# Altium PCB MCU099_MSPM0L1306_PCB.PcbDoc (part 1 of 5)
Units mil, origin at the board's own origin, x right, y up, seen from the top; angles counter-clockwise.
Board outline 2310.03 x 3906.03 mil, 4 copper layers (Top Layer, VCC Layer, GND Layer, Bottom Layer), stack 62.4 mil thick; 211 components, 124 nets, 674 pads, 192 vias.
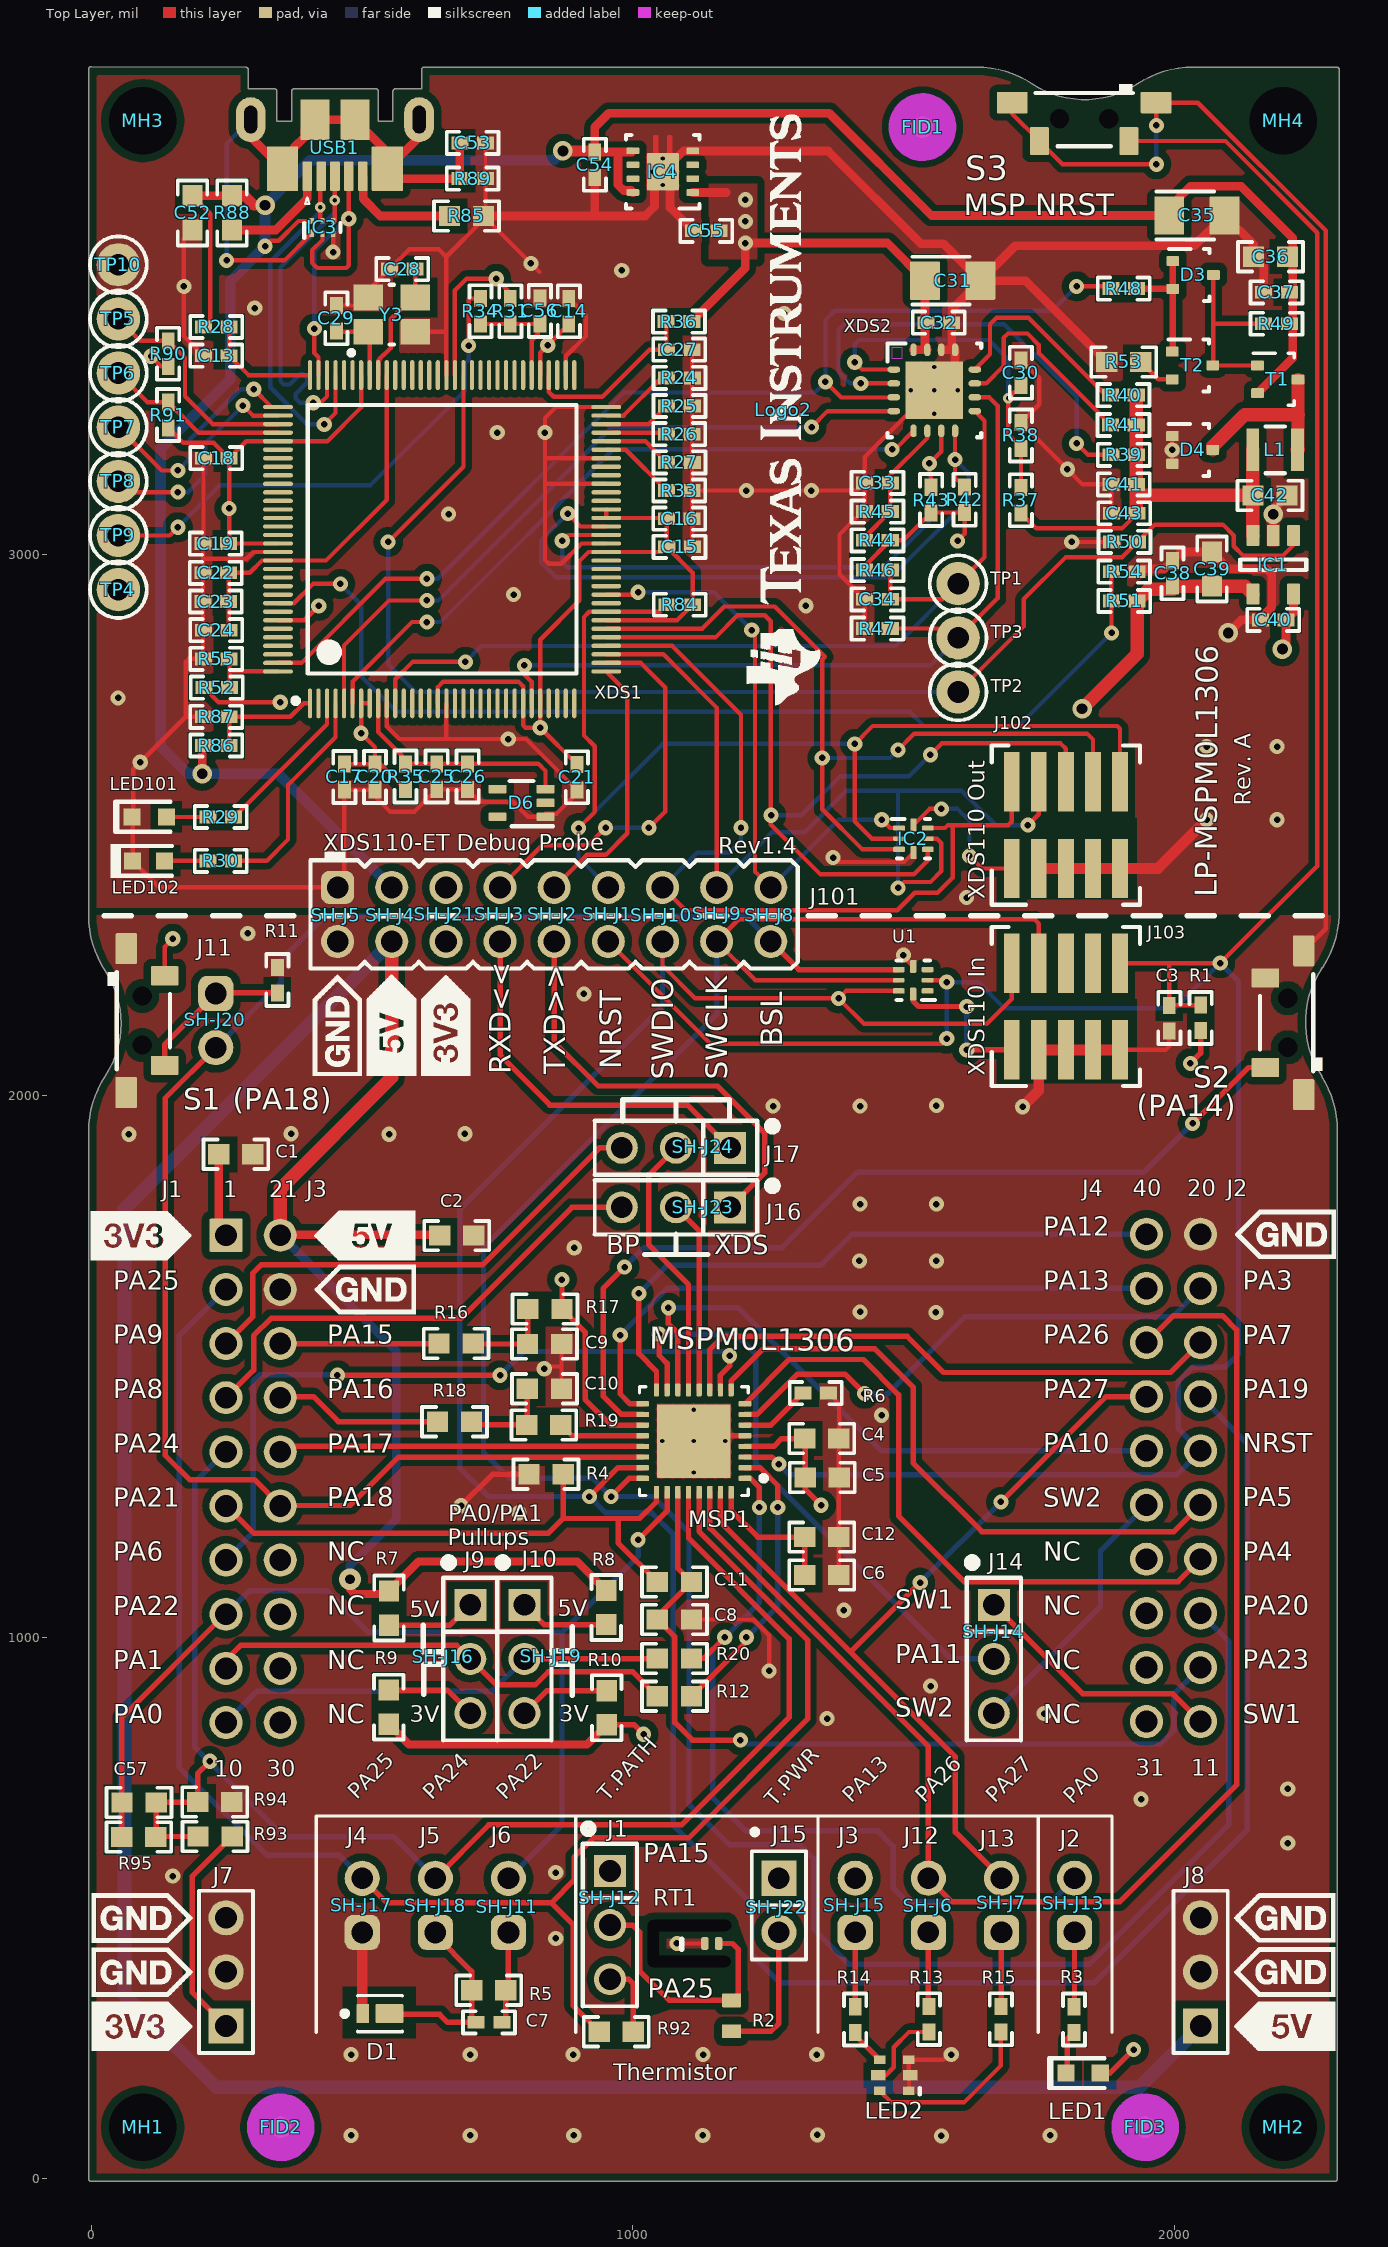
[diagram p0: Top Layer view]
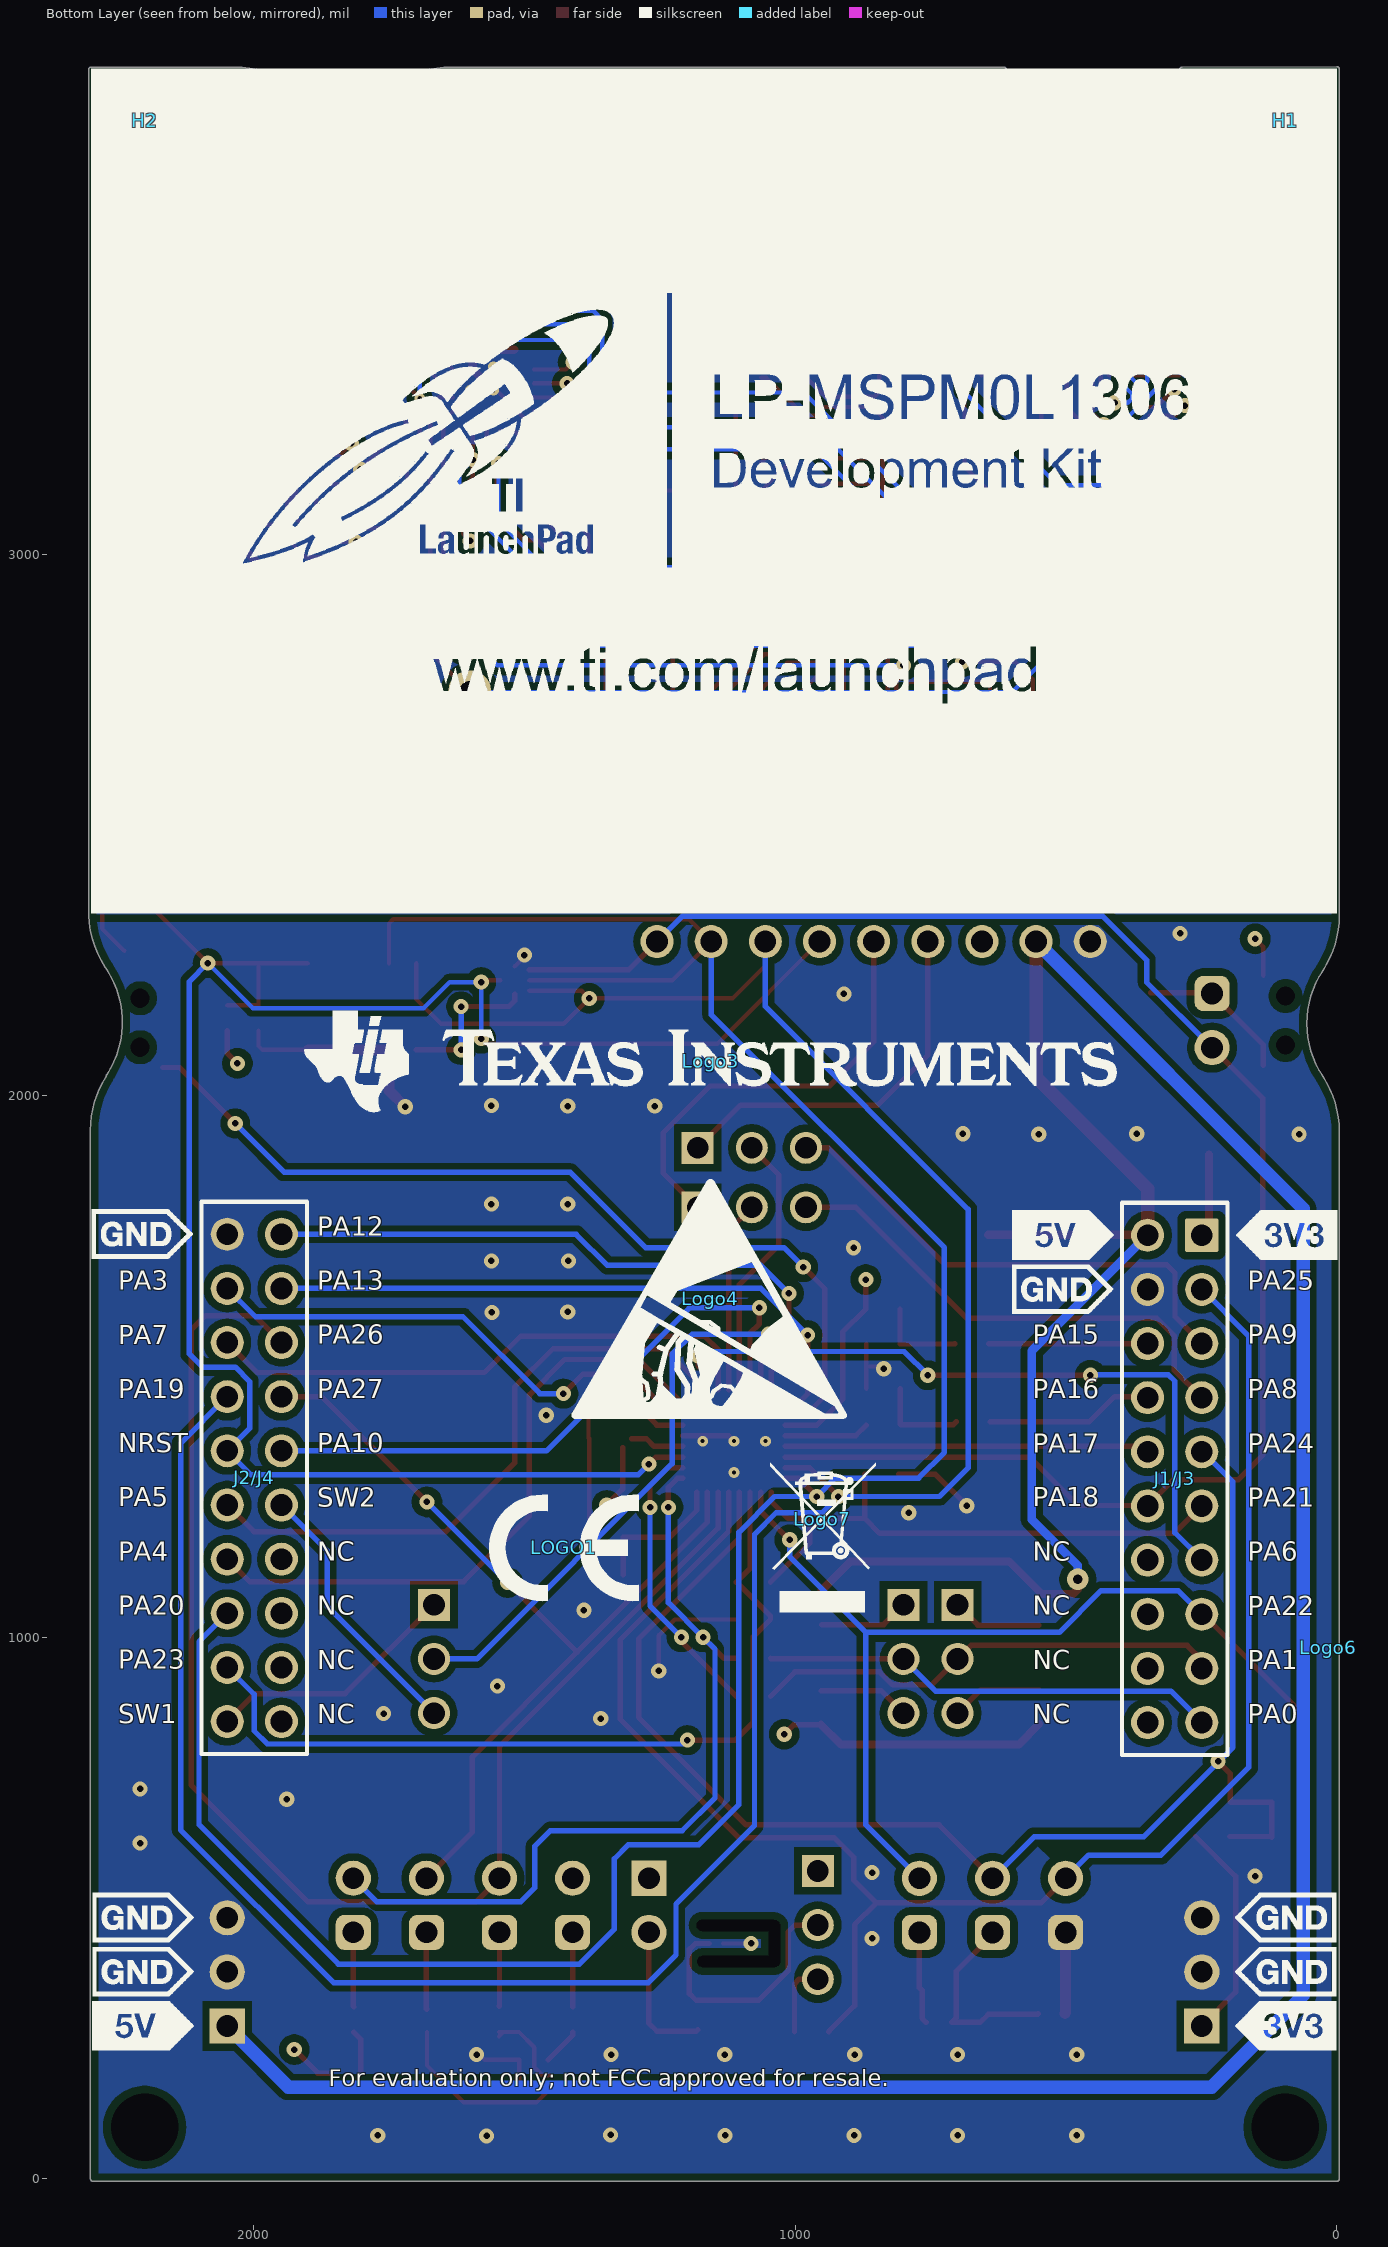
[diagram p1: Bottom Layer view, seen from below]
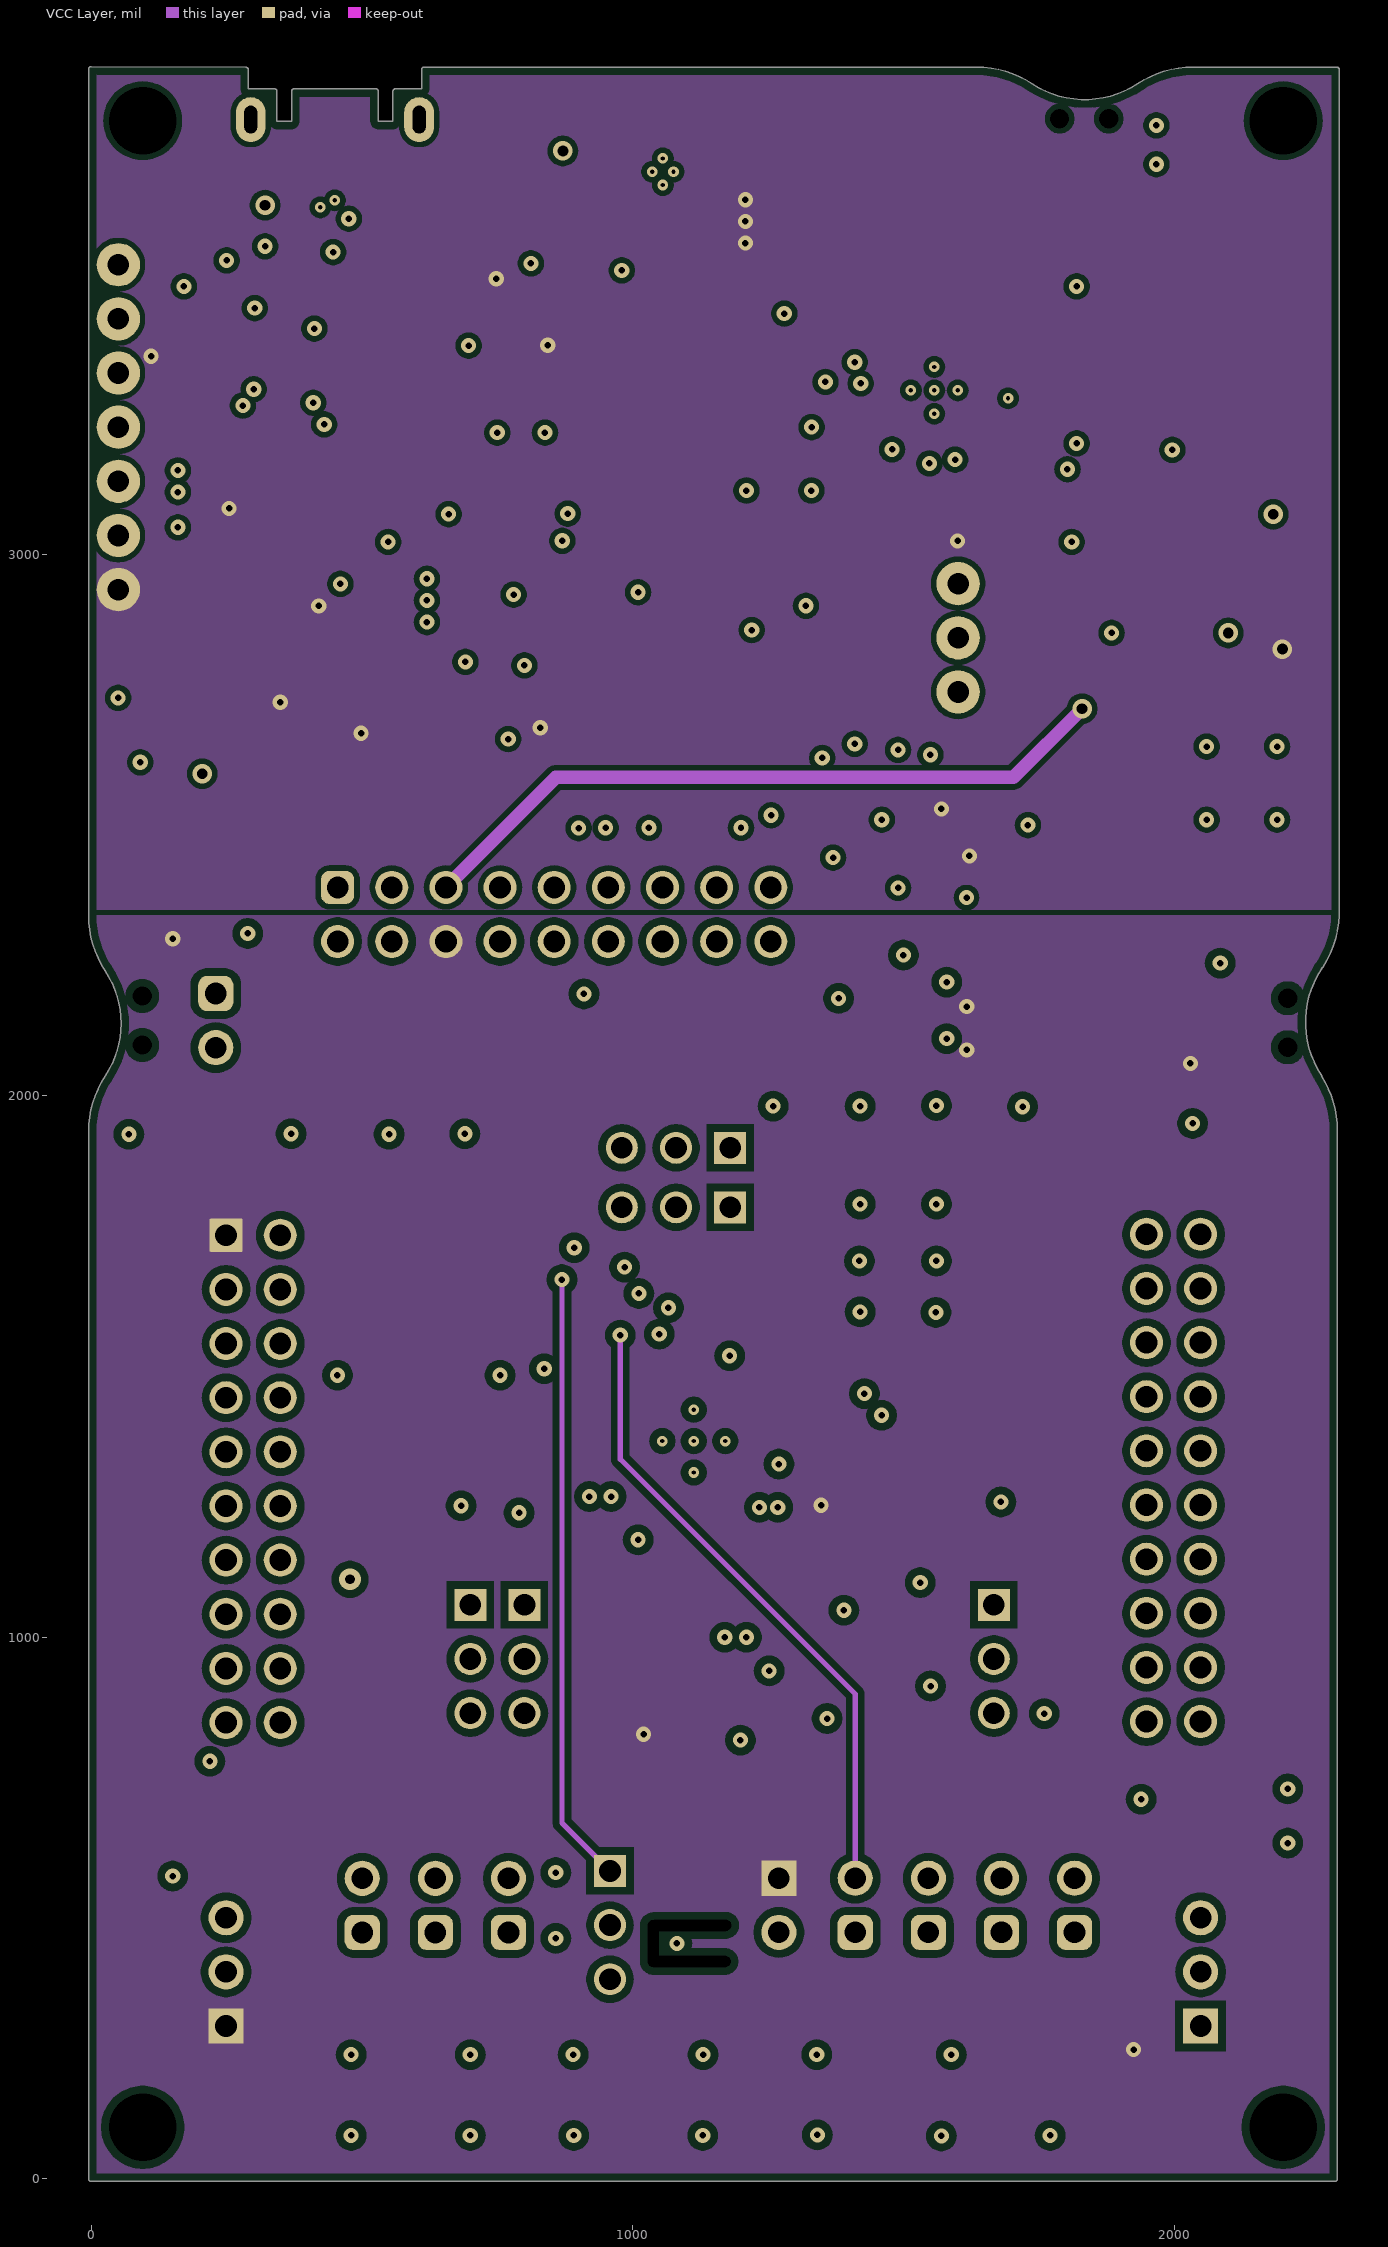
[diagram p2: VCC Layer]
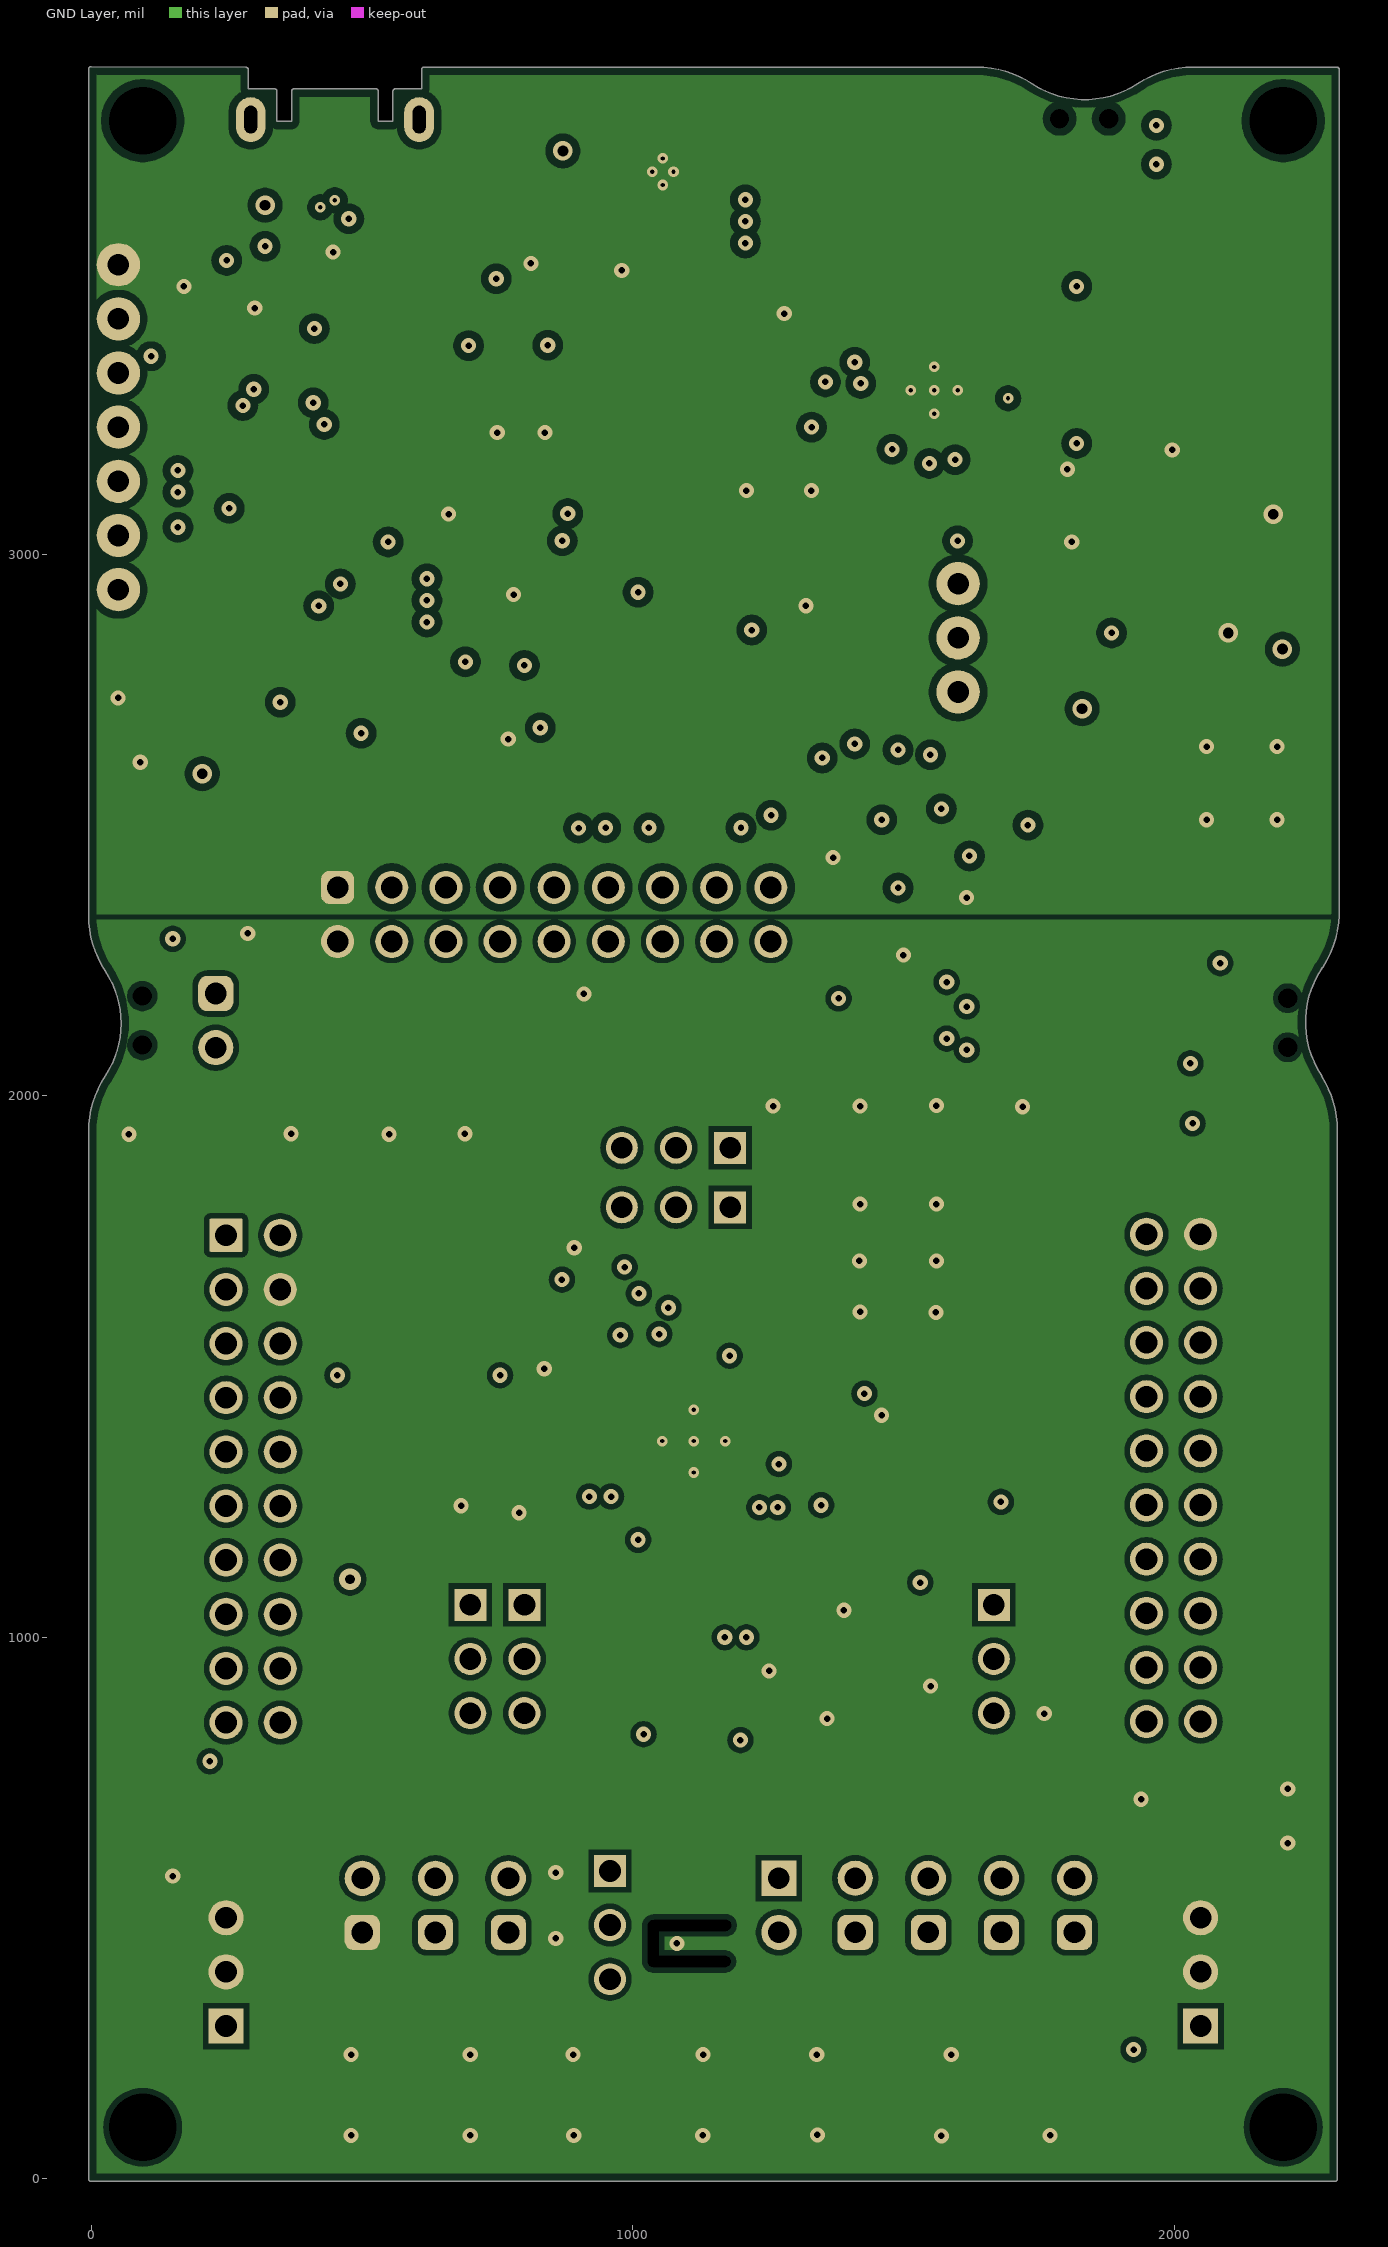
[diagram p3: GND Layer]

## Layer stack, top to bottom
Top Solder: solder mask 0.4, Solder Resist, Dk 3.5
Top Layer: signal copper 1.4
Dielectric 2: core 8.4, FR-4, Dk 4.2
VCC Layer: signal copper 1.4
Dielectric1: prepreg 40, FR-4, Dk 4.2
GND Layer: signal copper 1.4
Dielectric 3: core 8.4, FR-4, Dk 4.2
Bottom Layer: signal copper 1.4
Bottom Solder: solder mask 0.4, Solder Resist, Dk 3.5

## Board outline
-5.01,0 -5.01,1933.62 cw(c181.67,1933.62) 25.77,2036.32 cw(c181.67,1933.62) 25.81,2036.38 ccw(c-121.67,2133.62) 54.99,2133.62 ccw(c-121.67,2133.62) 25.81,2230.86 cw(c181.67,2333.62) -5.01,2333.62 cw(c0,2333.62) -4.97,2334.31 cw(c0,2335) -4.99,2335.51 ccw(c0,2336) -4.87,2334.81 ccw(c0,2333.62) -4.97,2334.31 -4.99,2335.51 cw(c0,2336) -5.01,2336 -5.01,3896 cw(c0,3896) 0.02,3901.01 285.02,3900.02 cw(c285,3895) 290.01,3895 290.01,3860.02 338,3860.02 cw(c338,3855) 343.01,3855 343.01,3800.02 369.98,3800.02 369.98,3855 cw(c375,3855) 375,3860.02 525,3860.02 cw(c525,3855) 530.01,3855 530.01,3800.02 556.98,3800.02 556.98,3855 cw(c562,3855) 562,3860.02 609.98,3860.02 609.98,3895 cw(c615,3895) 615,3900.02 1635,3900.02 cw(c1635,3713.33) 1737.76,3869.19 ccw(c1835,4016.67) 1737.79,3869.17 ccw(c1835,4016.67) 1932.14,3869.12 ccw(c1835,4016.67) 1932.24,3869.18 1932.24,3869.19 cw(c2035,3713.33) 2035,3900.02 2300,3900.02 cw(c2300,3895) 2305.01,3895 2305.01,2340.04 cw(c2118.33,2340.04) 2304.96,2335.71 cw(c2118.33,2340.04) 2304.92,2334.02 cw(c2118.33,2340.04) 2274.19,2237.27 cw(c2270,2240.04) 2272.47,2235.67 cw(c2267.48,2236.12) 2271.67,2233.36 ccw(c2419.15,2136.12) 2271.66,2038.88 cw(c2267.48,2036.12) 2272.49,2036.12 cw(c2267.48,2036.12) 2272.49,2036.06 cw(c2114.81,1936.12) 2301.49,1936.12 2301.49,0.03 cw(c2296.48,0) 2301.49,0 cw(c2296.48,0) 2296.48,-5.01 0,-5.01 cw(c0,0)

## Design rules (kind name [scope] priority, off if disabled: settings)
AcuteAngle [All] p1: minimum=4.50000000000000E+0001 checktracksonly=FALSE
AssemblyTestPointUsage [All] p1: valid=2
BoardOutlineClearance BoardOutlineClearance_MountingHoles [OnCopper and InComponentClass('Mounting Holes')] p1: gap=15 ignorepadtopadclearanceinfootprint=FALSE
BoardOutlineClearance BoardOutlineClearance_Poly [OnCopper and IsPoly] p2: gap=15 ignorepadtopadclearanceinfootprint=FALSE
BoardOutlineClearance [OnCopper and Not InComponentClass('Logo') and not InComponentClass('FiducialMark') and not InRegion(1000,500,4000,800) and not InPoly] p3: gap=10 ignorepadtopadclearanceinfootprint=FALSE
Clearance Clearance_1 [InNamedPolygon('BOTTOM_LAYER_XDS_GND_P014')] p1: gap=14 ignorepadtopadclearanceinfootprint=FALSE except(0: Arc-Hole Track-Hole SMDPad-Hole THPad-Hole Via-Hole Fill-Hole Poly-Hole Region-Hole Text-Hole; 10: Arc-Arc Arc-Track Track-Track)
Clearance SMD [InNamedPolygon('GND_LAYER_GND_P-001')] p2: gap=10 ignorepadtopadclearanceinfootprint=FALSE except(0: Arc-Hole Track-Hole SMDPad-Hole THPad-Hole Via-Hole Fill-Hole Poly-Hole Region-Hole Text-Hole; 20: SMDPad-SMDPad SMDPad-THPad SMDPad-Via SMDPad-Fill SMDPad-Poly SMDPad-Region SMDPad-Text)
Clearance Clearance_FiducialMark [IsKeepOut and InComponentClass('FiducialMark') vs IsPad and InComponentClass('FiducialMark')] p3: gap=0 ignorepadtopadclearanceinfootprint=FALSE
Clearance Clearance_Keepouts [((IsTrack Or IsArc) And Not InPoly) And IsFree and IsKeepOut vs ((IsTrack Or IsArc) And Not InPoly) And IsFree and IsKeepOut] p4: gap=0 ignorepadtopadclearanceinfootprint=FALSE
Clearance Clearance_Poly [InPolygon] p5: gap=14 ignorepadtopadclearanceinfootprint=FALSE except(0: Arc-Hole Track-Hole SMDPad-Hole THPad-Hole Via-Hole Fill-Hole Poly-Hole Region-Hole Text-Hole; 12: Arc-Fill Arc-Poly Arc-Region Track-Fill Track-Poly Track-Region; 15: THPad-THPad)
Clearance [All] p6: gap=6 ignorepadtopadclearanceinfootprint=FALSE
ComponentClearance ComponentClearance_Standoffs [HasFootprint('KY_MAE-10') vs HasFootprint('NPTH125mil')] p1: gap=0 collisioncheckmode=3 verticalgap=0 showdistances=FALSE
ComponentClearance ComponentClearance_2PinHeaders [HasFootprint('TSW-102-07-G-S') vs HasFootprint('TSW-102-07-G-S')] p2: gap=0 collisioncheckmode=3 verticalgap=0 showdistances=FALSE
ComponentClearance ComponentClearance_TestPoint [HasFootprint('Keystone5001') vs HasFootprint('Keystone5001')] p3: gap=0 collisioncheckmode=3 verticalgap=0 showdistances=FALSE
ComponentClearance ComponentClearance_MountingHoles_FiducialMarks [InComponentClass('Mounting Holes') vs InComponentClass('FiducialMark')] p4: gap=0 collisioncheckmode=3 verticalgap=0 showdistances=FALSE
ComponentClearance ComponentClearance_ShuntToShunt [InComponentClass('Shunt') vs InComponentClass('Shunt')] p5: gap=0 collisioncheckmode=3 verticalgap=0 showdistances=FALSE
ComponentClearance ComponentClearance_Shunt [InComponentClass('Header') vs InComponentClass('Shunt')] p6: gap=0 collisioncheckmode=3 verticalgap=0 showdistances=FALSE
ComponentClearance ComponentClearance_Logo [InComponentClass('Logo')] p7: gap=0 collisioncheckmode=3 verticalgap=0 showdistances=FALSE
ComponentClearance ComponentClearance_ScrewToNut [(HasFootprint('NY PMS 440 0025 PH')) vs (HasFootprint('Keystone_1902C'))] p8: gap=5 collisioncheckmode=3 verticalgap=10 showdistances=FALSE
ComponentClearance ComponentClearance_MountingHoles [InComponentClass('Mounting Holes')] p9: gap=250 collisioncheckmode=3 verticalgap=100000 showdistances=FALSE
ComponentClearance ComponentClearance_SmallPassives [HasFootprint('0201*') or HasFootprint('0402*') or HasFootprint('0508') or HasFootprint('0603*') or HasFootprint('0612') or HasFootprint('0805*') or HasFootprint('0815*') or HasFootprint('0830*') or HasFootprint('1206*') or HasFootprint('1210*') or HasFootprint('1808*') or HasFootprint('1812*') or HasFootprint('1825*') or HasFootprint('2010*') or HasFootprint('2220*') or HasFootprint('2225*') or HasFootprint('2512*') or HasFootprint('2728*') or HasFootprint('3518*') vs HasFootprint('0201*') or HasFootprint('0402*') or HasFootprint('0508') or HasFootprint('0603*') or HasFootprint('0612') or HasFootprint('0805*') or HasFootprint('0815*') or HasFootprint('0830*') or HasFootprint('1206*') or HasFootprint('1210*') or HasFootprint('1808*') or HasFootprint('1812*') or HasFootprint('1825*') or HasFootprint('2010*') or HasFootprint('2220*') or HasFootprint('2225*') or HasFootprint('2512*') or HasFootprint('2728*') or HasFootprint('3518*')] p10: gap=0 collisioncheckmode=3 verticalgap=0 showdistances=FALSE
ComponentClearance ComponentClearance_THtoSMT [IsThruComponent vs IsSMTComponent] p11: gap=0 collisioncheckmode=3 verticalgap=0 showdistances=FALSE
ComponentClearance ComponentClearance_THtoTH [IsThruComponent vs IsThruComponent] p12: gap=0 collisioncheckmode=3 verticalgap=0 showdistances=FALSE
ComponentClearance [All] p13: gap=0 collisioncheckmode=3 verticalgap=0 showdistances=FALSE
DiffPairsRouting [All] p1: maxlimit=100 minlimit=10 mostfreqgap=10 toplayer_minwidth=15 toplayer_maxwidth=15 toplayer_prefwidth=15 midlayer1_minwidth=15 midlayer1_maxwidth=15 midlayer1_prefwidth=15 midlayer2_minwidth=15 midlayer2_maxwidth=15 midlayer2_prefwidth=15 bottomlayer_minwidth=15 bottomlayer_maxwidth=15 bottomlayer_prefwidth=15 maxuncoupledlength=1000
FabricationTestPointUsage TestPointUsage [All] p1: valid=2 allowmultiple=FALSE
FabricationTestpoint Testpoint [All] p1: side=3 testpointundercomponent=TRUE minsize=40 maxsize=100 preferedsize=60 minholesize=0 maxholesize=40 preferedholesize=32 testpointgrid=1 allowsidetop=TRUE allowsidebottom=TRUE usegrid=TRUE gridtolerance=0.01
FanoutControl Fanout_LCC [IsLCC] p1: bgadir=Out bgaviamode=Centered fanoutstyle=Auto fanoutdirection=Alternating viagrid=1 // Fanout_LCC (Default Rule)
FanoutControl Fanout_BGA [IsBGA] p2: bgadir=Out bgaviamode=Centered fanoutstyle=Auto fanoutdirection=Alternating viagrid=1 // Fanout_BGA (Default Rule)
FanoutControl Fanout_Default [All] p4: bgadir=Out bgaviamode=Centered fanoutstyle=Auto fanoutdirection=Alternating viagrid=1 // Fanout_Default (Default Rule)
FanoutControl Fanout_Small [(CompPinCount < 5)] p5: bgadir=Out bgaviamode=Centered fanoutstyle=Auto fanoutdirection=OutThenIn viagrid=1 // Fanout_Small (Default Rule)
HoleSize [All] p1: absolutevalues=TRUE maxlimit=251 minlimit=10 maxpercent=80.000 minpercent=20.000
MinimumAnnularRing MinimumAnnularRing_ThermalPadVias [IsVia and InAnyComponent] p1: minimumring=5.91
MinimumAnnularRing [All] p2: minimumring=6
MinimumSolderMaskSliver MinimumSolderMaskSliver_Logo [InComponentClass('Logo') vs InComponentClass('Logo')] p1: minsoldermaskwidth=0.7
MinimumSolderMaskSliver [All] p2: minsoldermaskwidth=3.94
PlaneClearance [All] p1: clearance=10
PlaneConnect [All] p1: planeconnectstyle=Relief reliefexpansion=10 reliefentries=4 reliefconductorwidth=10 reliefairgap=10
PolygonConnect [All] p1: connectstyle=Direct reliefconductorwidth=10 reliefentries=4 polygonreliefangle="90 Angle" airgapwidth=10
RoutingVias ThermalPadVias [IsVia and InAnyComponent] p1: holewidth=7.87 width=19.68 viastyle="Through Hole" minholewidth=7.87 minwidth=19.68 maxholewidth=16 maxwidth=30
RoutingVias [All] p2: holewidth=12 width=28 viastyle="Through Hole" minholewidth=7.87 minwidth=26 maxholewidth=40 maxwidth=65
SilkToBoardRegionClearance [Not ((IsComment or IsDesignator) And (Hide <> 'False')) and not InRegion(1000,500,4000,800)] p1:
SilkToSilkClearance SilkToSilkClearance_Pb-FreeLogo [(HasFootprint('Pb-Free_Overlay_Medium') OR HasFootprint('Pb-Free_Overlay_Small')) vs (HasFootprint('Pb-Free_Overlay_Medium') OR HasFootprint('Pb-Free_Overlay_Small'))] p1: silktosilkclearance=0
SilkToSilkClearance [All] p2: silktosilkclearance=0
SilkToSolderMaskClearance SilkToComponentPadClearance [(IsPad or IsFill or IsRegion) and InAnycomponent] p1: minsilkscreentomaskgap=0 clearancetoexposedcopper=TRUE
SilkToSolderMaskClearance "Silk to Solder Mask Opening" [All] p2: minsilkscreentomaskgap=0 clearancetoexposedcopper=FALSE
SolderMaskExpansion SolderMaskExpansion_via [isvia] p1: expansion=-17 istentingtop=FALSE
SolderMaskExpansion [All] p2: expansion=1.97 istentingtop=FALSE
Width [All] p1: maxlimit=100 minlimit=6 preferedwidth=10 checkconnectedcopper=TRUE
14 further rules are at their usual default settings.

## Classes and differential pairs
component class MCU099_01_MSPM0L1306_Target_Device: C1 C2 C3 C4 C5 C6 C7 C8 C9 C10 C11 C12 C57 D1 J1 J1/J3 J2 J2/J4 J3 J4 J5 J6 J7 J8 J9 J10 J11 J12 J13 J14 J15 J16 J17 LED1 LED2 R1 R2 R3 R4 R5 R6 R7 R8 R9 R10 R11 R12 R13 R14 R15 R16 R17 R18 R19 R20 R92 R93 R94 R95 RT1 S1 S3 S3(PA14) U1
component class MCU099_06_Hardware: "30N.C. ROUTE" !PCB FID1 FID2 FID3 H1 H2 LOGO1 Logo2 Logo3 Logo4 Logo6 Logo7 MH1 MH2 MH3 MH4 SH-J1 SH-J2 SH-J3 SH-J4 SH-J5 SH-J6 SH-J7 SH-J8 SH-J9 SH-J10 SH-J11 SH-J12 SH-J13 SH-J14 SH-J15 SH-J16 SH-J17 SH-J18 SH-J19 SH-J20 SH-J21 SH-J22 SH-J23 SH-J24 SH-J101A SH-J101B SH-J101C SH-J101D SH-J101E SH-J101F SH-J101G SH-J101H SH-J101I SH-J101J USB1 ZZ1 ZZ2 ZZ3 ZZ4
component class MCU099_05_XDS110-ET_USB_Power: "30N.C. ROUTE" C52 C53 C54 C55 IC3 IC4 R85 R86 R87 R88 R89 R90 R91 TP4 TP5 TP6 TP7 TP8 TP9 TP10 USB2
component class MCU099_04_XDS110_Target_Interface: "30N.C. ROUTE" IC2 J101 J102 J103 R84 U3
component class MCU099_03_XDS110-ET_EnergyTrace: "30N.C. ROUTE" C30 C31 C32 C33 C34 C35 C36 C37 C38 C39 C40 C41 C42 C43 D3 D4 IC1 L1 MSP2 R37 R38 R39 R40 R41 R42 R43 R44 R45 R46 R47 R48 R49 R50 R51 R52 R53 R54 R55 T1 T2
component class MCU099_02_XDS110_Debug_Probe: "30N.C. ROUTE" C13 C14 C15 C16 C17 C18 C19 C20 C21 C22 C23 C24 C25 C26 C27 C28 C29 C56 D6 LED101 LED102 MSP1 R24 R25 R26 R27 R28 R29 R30 R31 R33 R34 R35 R36 TP1 TP2 TP3 Y3
component class FiducialMark: "30N.C. ROUTE" FID1 FID2 FID3
component class AssemblyNote: "30N.C. ROUTE" ZZ2 ZZ3 ZZ4 ZZ6
component class Logo: "30N.C. ROUTE" Logo2 Logo3
component class Header: "30N.C. ROUTE" J1 J2 J3 J4 J5 J6 J7 J8 J9 J10 J11 J12 J13 J14 J15 J16 J17 J101
component class Shunt: SH-J1 SH-J2 SH-J3 SH-J4 SH-J5 SH-J6 SH-J7 SH-J8 SH-J9 SH-J10 SH-J11 SH-J12 SH-J13 SH-J14 SH-J15 SH-J16 SH-J17 SH-J18 SH-J19 SH-J20 SH-J21 SH-J22 SH-J23 SH-J24

## Components (designator, comment, footprint, x,y, rotation, side; value= is the part's Value field where it differs from the comment)
C1 "CL10A104KA8NNNC" 0603 267,1892 r0 top value=0.1uF
C2 "CL10A104KA8NNNC" 0603 675,1741.85 r0 top value=0.1uF
C3 "885012205031" 0402 1991,2143.62 r270 top value=0.01uF
C4 "GRM188R61C106KAALD" 0603 1349,1367 r0 top value=10uF
C5 "CL10A104KA8NNNC" 0603 1350,1295 r0 top value=0.1uF
C6 "C0603C474K8PACTU" 0603 1349,1114.98 r0 top value=0.47uF
C7 "GRM1555C1E470JA01D" 0402 734.56,288.85 r0 top value=47pF
C8 "C1608X5R1A105K080AC" 0603 1077,1033 r0 top value=1uF
C9 "C0603C225K8PACTU" 0603 837.18,1541.72 r0 top value=2.2uF
C10 "C0603C225K8PACTU" 0603 837,1459 r0 top value=2.2uF
C11 "C1608X5R1A105K080AC" 0603 1077,1102 r180 top value=1uF
C12 "CL10A104KA8NNNC" 0603 1349,1185 r0 top value=0.1uF
C13 "C1005X5R1A104K050BA" 0402 231,3367 r180 top value=0.1uF
C14 "GRM155R71E103KA01D" 0402 882,3449 r90 top value=0.01uF
C15 "GRM155R71E103KA01D" 0402 1086.5,3014 r0 top value=0.01uF
C16 "GRM155R71E103KA01D" 0402 1086,3066 r0 top value=0.01uF
C17 "C1005X5R1A104K050BA" 0402 467.5,2589 r270 top value=0.1uF
C18 "C1005X5R1A104K050BA" 0402 231,3177.61 r180 top value=0.1uF
C19 "C1005X5R1E105K050BC" 0402 230,3020 r180 top value=1uF
C20 "C1005X5R1E105K050BC" 0402 524,2589 r270 top value=1uF
C21 "GRM155R71E103KA01D" 0402 897,2588.38 r270 top value=0.01uF
C22 "GRM155R60J225KE95D" 0402 230,2966 r180 top value=2.2uF
C23 "C1005X5R1A104K050BA" 0402 230,2913 r180 top value=0.1uF
C24 "C1005X5R1E105K050BC" 0402 231,2860 r180 top value=1uF
C25 "GRM155R71E103KA01D" 0402 638,2589.63 r270 top value=0.01uF
C26 "C1005X5R1A104K050BA" 0402 695,2589.63 r270 top value=0.1uF
C27 "C1005X5R1A104K050BA" 0402 1086,3378 r0 top value=0.1uF
C28 "GRM1555C1H120JA01D" 0402 574.38,3526.97 r180 top value=12pF
C29 "GRM1555C1H120JA01D" 0402 452.72,3436 r90 top value=12pF
C30 "GRM1555C1H330JA01D" 0402 1717,3335.62 r90 top value=33pF
C31 "TAJA475K016RNJ" 3216-18 1591.02,3505.58 r0 top value=4.7uF
C32 "C1005X5R1A104K050BA" 0402 1565.38,3428 r0 top value=0.1uF
C33 "GRM1555C1H330JA01D" 0402 1452,3132 r180 top value=33pF
C34 "GRM155R60J102KA01D" 0402 1452,2917 r180 top value=1000pF
C35 "TAJA475K016RNJ" 3216-18 2042,3626 r0 top value=4.7uF
C36 "GRM188R61C475KAAJ" 0603 2178,3549.87 r0 top value=4.7uF
C37 "C1005X5R1A104K050BA" 0402 2189,3484 r180 top value=0.1uF
C38 "C1005X5R1A104K050BA" 0402 1997,2965 r90 top value=0.1uF
C39 "GRM188R60J476ME15D" 0603 2070,2973 r90 top value=47uF
C40 "GRM155R71C224KA12D" 0402 2183,2879 r180 top value=0.22uF
C41 "GRM155R71C224KA12D" 0402 1907,3129.35 r180 top value=0.22uF
C42 "GRM188R61C475KAAJ" 0603 2177,3109 r180 top value=4.7uF
C43 "C1005X5R1A104K050BA" 0402 1908,3076 r180 top value=0.1uF
C52 "C0603C225K8PACTU" 0603 187,3630.72 r270 top value=2.2uF
C53 "GRM155R71H332KA01D" 0402 704.38,3760 r0 top value=3300pF
C54 "C1005X5R1E105K050BC" 0402 930,3719.58 r270 top value=1uF
C55 "GRM155R60J225KE95D" 0402 1135.72,3597.58 r180 top value=2.2uF
C56 "C0402C104K8RACTU" 0402 828.51,3449.57 r90 top value=0.1uF
C57 "C0603C225K8PACTU" 0603 88.38,695 r180 top value=2.2uF
D1 "VEMD4110X01" FP-VEMD4110X01_0805-MFG 533,305 r270 top
D3 "BAS40-05W,115" SOT-323 2035,3516.13 r0 top value=40V
D4 "BAS40-05W,115" SOT-323 2034,3193 r0 top value=40V
D6 "LM4040B25IDCKR" DCK0005A_N 794.5,2541 r180 top
FID1 "Fiducial" Fiducial10-30 1535.26,3789.22 r0 top
FID2 "Fiducial" Fiducial10-30 350,95 r0 top
FID3 "Fiducial" Fiducial10-30 1946.48,95 r0 top
H1 "MAE-10" KY_MAE-10 95,3801 r180 bottom
H2 "MAE-10" KY_MAE-10 2201.48,3801 r180 bottom
IC1 "TPS2102DBVR" DBV0005A_N 2183,2980.87 r270 top
IC2 "TPD6E004RSER" RSE0008A 1518.56,2474.88 r0 top
IC3 "TPD4E004DRYR" DRY0006A 427,3604 r90 top
IC4 "TPS73533DRBT" DRB0008A 1055.61,3706.78 r180 top
J1 "PEC03SAAN" CONN_PEC03SAAN 958,468.5 r270 top
J1/J3 "SSQ-110-03-T-D" BoosterPack_40pin_J1J3 299,1292.53 r180 bottom
J2 "TSW-102-07-G-S" TSW-102-07-G-S 1816,505 r90 top
J2/J4 "SSQ-110-03-T-D" BoosterPack_40pin_J2J4 1998.88,1294.35 r180 bottom
J3 "TSW-102-07-G-S" TSW-102-07-G-S 1411,505 r90 top
J4 "TSW-102-07-G-S" TSW-102-07-G-S 500.47,504.85 r90 top
J5 "TSW-102-07-G-S" TSW-102-07-G-S 635.47,504.85 r90 top
J6 "TSW-102-07-G-S" TSW-102-07-G-S 770.47,504.85 r90 top
J7 "PEC03SAAN" PEC03SAAN_Launchpad_3V3 248.88,382 r90 top
J8 "PEC03SAAN" PEC03SAAN_Launchpad_5V0 2048.88,382 r90 top
J9 "PEC03SAAN" CONN_PEC03SAAN 700,960 r270 top
J10 "PEC03SAAN" CONN_PEC03SAAN 800,960 r270 top
J11 "TSW-102-07-G-S" TSW-102-07-G-S 230,2139 r270 top
J12 "TSW-102-07-G-S" TSW-102-07-G-S 1546,505 r90 top
J13 "TSW-102-07-G-S" TSW-102-07-G-S 1681,505 r90 top
J14 "PEC03SAAN" CONN_PEC03SAAN 1667,960 r270 top
J15 "90120-0122" CONN_90120-0122 1270,505 r270 top
J16 "PEC03SAAN" CONN_PEC03SAAN 1080,1794 r180 top
J17 "PEC03SAAN" CONN_PEC03SAAN 1080,1904 r180 top
J101 "PEC09DAAN" Sullins_PxC09DAAN 855,2335 r270 top
J102 "FTSH-105-01-L-DV-K" Samtec_FTSH-105-01-x-DV-K 1800,2500 r90 top
J103 "FTSH-105-01-L-DV-K" Samtec_FTSH-105-01-x-DV-K 1800,2165 r90 top
L1 "CBC2518T2R2M" CBC2518 2186.4,3193 r180 top value=2.2uH
LED1 "BR1111C-TR" 1111C_Red 1832,195 r180 top value=Red
LED2 "19-337/R6GHBHC-A01/2T" 19-337_RGB 1483,191 r180 top value=RGB
LED101 "BR1111C-TR" 1111C_Red 107.12,2515.41 r180 top value=Red
LED102 "LTST-C190GKT" LED_LTST-C190 106,2434 r180 top value=Green
LOGO1 "CE Mark" CE_Mark_5mm 1427.09,1165 r180 bottom
Logo2 "Texas Instruments" TI_Horizontal_Overlay_Small 1278,3267 r90 top
Logo3 "Texas Instruments" TI_Horizontal_Overlay_Medium 1156.28,2063.5 r180 bottom
Logo4 "ESD Susceptible" ESD_Overlay_Large 1156.78,1624.89 r180 bottom
Logo6 "FCC disclaimer" FCC_disclaimer 15,981 r90 bottom
Logo7 "WEEE logo" WEEE_Minimum 950.12,1218.36 r180 bottom
MH1 "MTG_NoPads" NPTH125mil 95,95 r0 top
MH2 "MTG_NoPads" NPTH125mil 2201.48,95 r0 top
MH3 "MTG_NoPads" NPTH125mil 95,3801 r0 top
MH4 "MTG_NoPads" NPTH125mil 2201.48,3801 r0 top
MSP1 "MSPM0L1306SRHB" RHB0032N-MFG 1112.84,1362.37 r180 top
R1 "RC0402FR-0747KL" 0402 2049,2144 r270 top value=47.0k
R2 "ERA3ARB103V" ERA3A 1182.66,300.91 r270 top value=10.0k
R3 "RC0402FR-07470RL" 0402 1815,294 r270 top value=470
R4 "MCT06030Z0000ZP500" 0603 840,1301 r0 top value=0
R5 "CRCW06032M37FKEA" 0603 734.09,348.22 r0 top value=2.37Meg
R6 "RG1005P-104-B-T5" 0402 1338,1451 r0 top value=100k
R7 "RC0603JR-074K7L" 0603 550,1054 r90 top value=4.7k
R8 "RC0603JR-074K7L" 0603 951,1055 r90 top value=4.7k
R9 "RC0603JR-0710KL" 0603 549.38,871 r270 top value=2.2k
R10 "RC0603JR-0710KL" 0603 952,870 r270 top value=2.2k
R11 "RC0402FR-0747KL" 0402 343.71,2213.77 r270 top value=47.0k
R12 "RC0603JR-07270RL" 0603 1077,891 r180 top value=270
R13 "CRCW0402330RJNED" 0402 1547,294.75 r90 top value=330
R14 "CRCW0402330RJNED" 0402 1411,294 r270 top value=330
R15 "CRCW0402220RJNED" 0402 1680,294.5 r90 top value=220
R16 "MCT06030Z0000ZP500" 0603 673.88,1542.45 r0 top value=0
R17 "MCT06030Z0000ZP500" 0603 837.87,1606.35 r0 top value=0
R18 "MCT06030Z0000ZP500" 0603 670.84,1398.17 r0 top value=0
R19 "MCT06030Z0000ZP500" 0603 835.86,1392.22 r0 top value=0
R20 "RC0603JR-07270RL" 0603 1077,961 r180 top value=270
R24 "CRCW04021K00JNED" 0402 1086.37,3326 r0 top value=1.0k
R25 "CRCW04021K00JNED" 0402 1086.37,3274 r0 top value=1.0k
R26 "CRCW04021K00JNED" 0402 1086,3222 r0 top value=1.0k
R27 "CRCW04021K00JNED" 0402 1086.37,3170 r0 top value=1.0k
R28 "CRCW0402100RJNED" 0402 231,3420 r0 top value=100
R29 "CRCW0402470RJNED" 0402 239,2515 r0 top value=470
R30 "CRCW0402470RJNED" 0402 239,2434 r0 top value=470
R31 "CRCW040210K0JNED" 0402 774,3449 r90 top value=10k
R33 "CRCW04024K87FKED" 0402 1086,3118 r180 top value=4.87k
R34 "CRCW0402100RJNED" 0402 718.87,3449 r270 top value=100
R35 "CRCW04021K00JNED" 0402 580.39,2589.63 r270 top value=1.0k
R36 "CRCW040251R0JNED" 0402 1085.38,3430 r0 top value=51
R37 "RC0402FR-07220KL" 0402 1717,3100 r270 top value=220k
R38 "RC0402FR-07220KL" 0402 1717,3219.62 r270 top value=220k
R39 "ERJ-2RKF3301X" 0402 1907,3184 r0 top value=3.30k
R40 "CRCW04022K20FKED" 0402 1906.38,3294.2 r0 top value=2.20k
R41 "CRCW04026K81FKED" 0402 1906.38,3239 r0 top value=6.81k
R42 "CRCW04024K70JNED" 0402 1613,3101 r270 top value=4.7k
R43 "CRCW04024K70JNED" 0402 1551,3100.35 r270 top value=4.7k
R44 "RC0402FR-07220KL" 0402 1452,3026 r0 top value=220k
R45 "RC0402FR-07220KL" 0402 1452,3079 r0 top value=220k
R46 "RC0402FR-0747KL" 0402 1452,2971 r180 top value=47.0k
R47 "RC0402FR-0747KL" 0402 1452,2863 r0 top value=47.0k
R48 "RC0402FR-07820RL" 0402 1907,3491 r180 top value=820
R49 "CRCW0402470RJNED" 0402 2189,3426 r0 top value=470
R50 "RC0402FR-0747KL" 0402 1908.38,3023 r0 top value=47.0k
R51 "CRCW04024K70JNED" 0402 1908,2914 r0 top value=4.7k
R52 "CRCW0402220KJNED" 0402 231.62,2754 r180 top value=220k
R53 "RC0603JR-070RL" 0603 1907,3355.41 r0 top value=0
R54 "CRCW04024K70JNED" 0402 1907.62,2968 r180 top value=4.7k
R55 "CRCW0402220KJNED" 0402 231,2807 r0 top value=220k
R84 "ERJ-2RKF3301X" 0402 1087,2907 r0 top value=3.30k
R85 "RC0603JR-070RL" 0603 693,3625 r0 top value=0
R86 "RC0402FR-07330KL" 0402 231,2647 r0 top value=330k
R87 "RC0402FR-07220KL" 0402 231,2700 r0 top value=220k
R88 "RC0603JR-070RL" 0603 260,3630.72 r90 top value=0
R89 "CRCW04021M00FKED" 0402 704.38,3694 r180 top value=1.00Meg
R90 "CRCW040210K0JNED" 0402 142,3370.76 r90 top value=10k
R91 "CRCW040210K0JNED" 0402 142,3257.38 r90 top value=10k
R92 "RC0603JR-070RL" 0603 969.7,271.54 r0 top value=0
R93 "RC0603JR-070RL" 0603 228.6,632 r180 top value=0
R94 "RC0603JR-070RL" 0603 228,696 r180 top value=0
R95 "RC0603JR-070RL" 0603 87.88,631 r180 top value=0
RT1 "TMP6131DECT" DEC0002A 1145.92,434.5 r0 top
S1 "1188E-1K2-V-TR" SW_1188E 108,2139 r0 top
S2 "1188E-1K2-V-TR" SW_1188E 2196,2135 r180 top
S3 "1188E-1K2-V-TR" SW_1188E 1833.77,3791 r270 top
SH-J1 "SNT-100-BK-G" SNT-100-BK-G 954,2335 r90 top value="J101: 1-2"
SH-J2 "SNT-100-BK-G" SNT-100-BK-G 852.59,2335 r90 top value="J101: 3-4"
SH-J3 "SNT-100-BK-G" SNT-100-BK-G 754,2335 r90 top value="J101: 5-6"
SH-J4 "SNT-100-BK-G" SNT-100-BK-G 553.5,2334 r90 top value="J101: 7-8"
SH-J5 "SNT-100-BK-G" SNT-100-BK-G 452.5,2334 r90 top value="J101: 9-10"
SH-J6 "SNT-100-BK-G" SNT-100-BK-G 1546.09,504.45 r90 top value="J101: 11-12"
SH-J7 "SNT-100-BK-G" SNT-100-BK-G 1682,509.55 r90 top value="J101: 12-13"
SH-J8 "SNT-100-BK-G" SNT-100-BK-G 1253.53,2334 r90 top value="J101: 15-16"
SH-J9 "SNT-100-BK-G" SNT-100-BK-G 1156.09,2336 r90 top value="J101: 17-18"
SH-J10 "SNT-100-BK-G" SNT-100-BK-G 1054,2334 r90 top value="J14: 1-2"
SH-J11 "SNT-100-BK-G" SNT-100-BK-G 768.17,502.09 r90 top value="J1: 1-2"
SH-J12 "SNT-100-BK-G" SNT-100-BK-G 958,519 r90 top value="J2: 1-2"
SH-J13 "SNT-100-BK-G" SNT-100-BK-G 1815,508.5 r90 top value="J3: 1-2"
SH-J14 "SNT-100-BK-G" SNT-100-BK-G 1667,1010 r270 top value="J4: 1-2"
SH-J15 "SNT-100-BK-G" SNT-100-BK-G 1410.27,505.5 r90 top value="J5: 1-2"
SH-J16 "SNT-100-BK-G" SNT-100-BK-G 650,964 r0 top value="J6: 1-2"
SH-J17 "SNT-100-BK-G" SNT-100-BK-G 500,505.5 r90 top value="J9: 2"
SH-J18 "SNT-100-BK-G" SNT-100-BK-G 636,504.45 r90 top value="J10: 2"
SH-J19 "SNT-100-BK-G" SNT-100-BK-G 850,965 r0 top value="J11: 1-2"
SH-J20 "SNT-100-BK-G" SNT-100-BK-G 228.6,2141 r90 top value="J12: 1-2"
SH-J21 "SNT-100-BK-G" SNT-100-BK-G 654.09,2335 r90 top value="J13: 1-2"
SH-J22 "SNT-100-BK-G" SNT-100-BK-G 1266.35,501.37 r90 top value="J15: 1-2"
SH-J23 "SNT-100-BK-G" SNT-100-BK-G 1130,1794 r180 top value="J16: 1-2"
SH-J24 "SNT-100-BK-G" SNT-100-BK-G 1130,1906 r180 top value="J17: 1-2"
T1 "DMG1013UW-7" SOT-323 2191.4,3323.41 r0 top value=-20V
T2 "BC850CW,115" SOT-323 2034,3349 r0 top value="45 V"
TP1 "DNC" Keystone5001 1601,2946 r90 top
TP2 "DNC" Keystone5001 1601,2746 r90 top
TP3 "DNC" Keystone5001 1601,2846 r90 top
TP4 "DNC" Keystone5001 50,2935 r90 top
TP5 "DNC" Keystone5001 50,3435 r90 top
TP6 "DNC" Keystone5001 50,3335 r90 top
TP7 "DNC" Keystone5001 50,3235 r90 top
TP8 "DNC" Keystone5001 50,3135 r90 top
TP9 "DNC" Keystone5001 50,3035 r90 top
TP10 "DNC" Keystone5001 50,3535 r90 top
U1 "TPD6E004RSER" RSE0008A 1517.93,2213.49 r180 top
USB1 "1051640001" Molex_1051640001 450.09,3860.09 r180 top locked
XDS1 "MSP432E401YTPDTR" PDT0128A 648,3028 r90 top
XDS2 "MSP430G2452IRSA16R" RSA0016B 1557,3303 r0 top
Y3 "NX3225GA-16.000M-STD-CRG-1" NDK_NX3225GA 555,3443 r90 top
ZZ2 "These assemblies must be clean and free from flux and all contaminants. Use of no clean flux is not acceptable." AssemblyNote 145,4840 r0 top
ZZ3 "These assemblies must comply with workmanship standards IPC-A-610 Class 2, unless otherwise specified." AssemblyNote 140,4950 r0 top
ZZ4 "Place a click-in Standoff (MAE-10, KangYang)  in hole MH1/MH2" AssemblyNote 135,5045 r0 top

## Footprints (in the part's own frame and the unit in brackets; to place one, negate y for a bottom-side part, rotate by r counter-clockwise, add the part's x,y. Pads: shape width x height; smd on the part's side, far side on the other; paste and mask are expansions set on the pad)
19-337_RGB [mm] "SMD, 6-Leads, Body 1.6x1.6mm"
  rect 0.55x0.4 smd: 1(-0.675,0.725) 3(-0.675,-0.725) 4(0.675,0.725) 6(0.675,-0.725)
  rect 0.7x0.5 smd: 2(-0.75,0) 5(0.75,0)
  silkscreen extent -1.2,0.6 -1.2,0.9, body extent -0.85,-0.85 0.85,0.85, height 0.35
0402 [mm] "0402 from SM-752 data"
  rect 0.8x0.6 smd: 1(-0.6,0) 2(0.6,0)
  silkscreen extent -1.22,-0.52 1.22,0.52, body extent -0.55,-0.3 0.55,0.3, height 0.6
0603 [mm] "0603 from SM-752 data"
  rect 1x0.95 smd: 1(-0.8,0) 2(0.8,0)
  silkscreen extent -1.52,-0.69 1.52,0.69, body extent -0.87,-0.47 0.87,0.47, height 1
1111C_Red [mm] "SMD, 2-Leads, Body 1.6x0.8mm"
  rect 0.8x0.8 smd: 1(-0.8,0) 2(0.8,0)
  silkscreen extent -1,-0.7 1.7,0.7, body extent -0.85,-0.45 0.85,0.45, height 0.8
3216-18 [mm] "Based on AVX recommendation in http://www.avx.com/download/software/literature/AVX-Footprint-Library.pdf"
  rrect7% 1.4x1.8 smd: 1(-1.3,0) 2(1.3,0)
  silkscreen extent -1.9,-1.12 0.8,1.12, body extent -1.7,-0.9 1.7,0.9, height 1.82
AssemblyNote [mil] "Assembly Note"
BoosterPack_40pin_J1J3 [mm] "Receptacle, 2.54mm, 10x2, TH"
  rrect6% 1.55x1.55 hole 1.02: 1(1.27,11.43)
  round 1.55 hole 1.02: 2(1.27,8.89) 3(1.27,6.35) 4(1.27,3.81) 5(1.27,1.27) 6(1.27,-1.27) 7(1.27,-3.81) 8(1.27,-6.35) 9(1.27,-8.89) 10(1.27,-11.43) 21(-1.27,11.43) 22(-1.27,8.89) 23(-1.27,6.35) 24(-1.27,3.81) 25(-1.27,1.27) 26(-1.27,-1.27) 27(-1.27,-3.81) 28(-1.27,-6.35) 29(-1.27,-8.89) 30(-1.27,-11.43)
  silkscreen extent -7.62,-12.95 7.62,12.95, body extent -2.48,-12.95 2.48,12.95, height 8.51
BoosterPack_40pin_J2J4 [mm] "Receptacle, 2.54mm, 10x2, TH"
  round 1.55 hole 1.02: 11(-1.27,-11.43) 12(-1.27,-8.89) 13(-1.27,-6.35) 14(-1.27,-3.81) 15(-1.27,-1.27) 16(-1.27,1.27) 17(-1.27,3.81) 18(-1.27,6.35) 19(-1.27,8.89) 20(-1.27,11.43) 31(1.27,-11.43) 32(1.27,-8.89) 33(1.27,-6.35) 34(1.27,-3.81) 35(1.27,-1.27) 36(1.27,1.27) 37(1.27,3.81) 38(1.27,6.35) 39(1.27,8.89) 40(1.27,11.43)
  silkscreen extent -7.62,-12.95 2.48,12.95, body extent -2.48,-12.95 2.48,12.95, height 8.51
CBC2518 [mm] "Taiyo Yuden"
  rect 0.6x2 smd: 1(-1.05,0) 2(1.05,0)
  silkscreen extent -0.45,-1.1 0.45,1.1, body extent -1.35,-1 1.35,1, height 2
CE_Mark_5mm [mil] "Minimum text height for CE Mark"
  silkscreen extent -138,-98 138,98
CONN_90120-0122 [mm] "Molex"
  rect 1.65x1.65 hole 1.016 mask+0: 1(-1.27,0)
  round 1.65 hole 1.016 mask+0: 2(1.27,0)
  silkscreen extent -3.56,-1.27 2.54,1.27, body extent -2.54,-1.27 2.54,1.27, height 9.29
CONN_PEC03SAAN [mm] "SULLINS"
  rect 1.5x1.5 hole 1.016: 1(-2.54,0)
  round 1.5 hole 1.016: 2(0,0) 3(2.54,0)
  silkscreen extent -4.72,-1.27 3.81,1.27, body extent -3.84,-1.3 3.84,1.3, height 8.38
DBV0005A_N [mm] "SOT23, 5-Leads, Body 2.9x1.6mm, Pitch 0.95mm, Lead Span 2.8mm, IPC Medium Density"
  rrect17% 1x0.6 smd: 1(-1.375,0.95) 2(-1.375,0) 3(-1.375,-0.95) 4(1.375,-0.95) 5(1.375,0.95)
  silkscreen extent -0.25,-1.55 0.25,1.55, body extent -1.42,-1.46 1.42,1.46, height 1.09
DCK0005A_N [mm] "SOT353, 5-Leads, Body 2x1.3mm, Pitch 0.65mm, Lead Span 2.1mm, IPC Medium Density"
  rrect25% 0.85x0.4 smd: 1(-1.125,0.65) 2(-1.125,0) 3(-1.125,-0.65) 4(1.125,-0.65) 5(1.125,0.65)
  silkscreen extent -1.48,-1.02 0.55,1.1, body extent -1.14,-1 1.14,1, height 0.95
DEC0002A [mm] "X1SON-2"
  rrect57% 0.35x0.6 smd paste-0.5 mask-0.05: 1(-0.325,0) 2(0.325,0)
  rrect33% 0.3x0.5 on Top Paste: 1S(-0.35,0) 2S(0.35,0)
  body extent -0.5,-0.3 0.5,0.3, height 0.5
DRB0008A [mm] "VSON-8"
  rrect32% 0.6x0.31 smd: 1(-1.4,0.975) 2(-1.4,0.325) 3(-1.4,-0.325) 4(-1.4,-0.975) 5(1.4,-0.975) 6(1.4,-0.325) 7(1.4,0.325) 8(1.4,0.975)
  rrect7% 1.5x1.75 smd paste-0.75: 9(0,0)
  Top Layer region: -0.7,-0.875 -0.49,-0.875 -0.471,-0.879 -0.455,-0.89 -0.444,-0.906 -0.44,-0.925 -0.44,-0.925 -0.44,-1.65 -0.436,-1.669 -0.425,-1.685 -0.409,-1.696 -0.39,-1.7 -0.39,-1.7 -0.26,-1.7 -0.241,-1.696 -0.225,-1.685 -0.214,-1.669 -0.21,-1.65 -0.21,-1.65 -0.21,-0.925 -0.206,-0.906 -0.195,-0.89 -0.179,-0.879 -0.16,-0.875 -0.16,-0.875 0.16,-0.875 0.179,-0.879 0.195,-0.89 0.206,-0.906 0.21,-0.925 0.21,-0.925 0.21,-1.65 0.21,-1.65 0.214,-1.669 0.225,-1.685 0.241,-1.696 0.26,-1.7 0.26,-1.7 0.39,-1.7 0.409,-1.696 0.425,-1.685 0.436,-1.669 0.44,-1.65 0.44,-1.65 0.44,-0.925 0.444,-0.906 0.455,-0.89 0.471,-0.879 0.49,-0.875 0.49,-0.875 0.7,-0.875 0.719,-0.871 0.735,-0.86 0.746,-0.844 0.75,-0.825 0.75,-0.825 0.75,0.825 0.746,0.844 0.735,0.86 0.719,0.871 0.7,0.875 0.7,0.875 0.49,0.875 0.471,0.879 0.455,0.89 0.444,0.906 0.44,0.925 0.44,0.925 0.44,1.65 0.436,1.669 0.425,1.685 0.409,1.696 0.39,1.7 0.39,1.7 0.26,1.7 0.241,1.696 0.225,1.685 0.214,1.669 0.21,1.65 0.21,1.65 0.21,1.65 0.21,0.925 0.206,0.906 0.195,0.89 0.179,0.879 0.16,0.875 0.16,0.875 -0.16,0.875 -0.179,0.879 -0.195,0.89 -0.206,0.906 -0.21,0.925 -0.21,0.925 -0.21,1.65 -0.214,1.669 -0.225,1.685 -0.241,1.696 -0.26,1.7 -0.26,1.7 -0.39,1.7 -0.409,1.696 -0.425,1.685 -0.436,1.669 -0.44,1.65 -0.44,1.65 -0.44,0.925 -0.444,0.906 -0.455,0.89 -0.471,0.879 -0.49,0.875 -0.49,0.875 -0.7,0.875 -0.719,0.871 -0.735,0.86 -0.746,0.844 -0.75,0.825 -0.75,0.825 -0.75,-0.825 -0.746,-0.844 -0.735,-0.86 -0.719,-0.871 -0.7,-0.875
  silkscreen extent -1.73,-1.73 1.73,1.73, body extent -1.5,-1.5 1.5,1.5, height 0.77
DRY0006A [mm] "PSON, 6-Leads, Body 1x1.45mm, Pitch 0.5mm, TI Recommended"
  rect 0.35x0.2 smd: 1(-0.275,0.5)
  rect 0.3x0.2 smd: 2(-0.3,0) 3(-0.3,-0.5) 4(0.3,-0.5) 5(0.3,0) 6(0.3,0.5)
  silkscreen extent -0.5,-0.85 0.2,0.85, body extent -0.53,-0.75 0.53,0.75, height 0.61
ERA3A [mm] "SMD, 2-Leads, Body 1.6x0.8mm"
  rrect15% 0.65x0.9 smd: 1(-0.725,0) 2(0.725,0)
  body extent -0.9,-0.5 0.9,0.5, height 0.55
ESD_Overlay_Large [mil]
  silkscreen extent -254,-219 250,219
FCC_disclaimer [mil]
Fiducial10-30 [mm]
  round 1 smd mask+1: 1(0,0)
  Top Layer keep-out circle w1.678: c0,0 r0.75
FP-VEMD4110X01_0805-MFG [mm]
  rrect17% 0.9x0.6 smd paste+0 mask+0: 1(0,-0.8)
  rrect11% 0.9x1.3 smd paste+0 mask+0: 2(0,0.45)
  silkscreen extent -0.85,-1.77 0.85,1.05, body extent -0.77,-1.2 0.77,1.2, height 0.25
Keystone5001 [mil] "For Keystone 500x miniature loop terminals"
  round 80 hole 40: 1(0,0)
  silkscreen extent -52,-52 52,52, body extent -49,-49 49,49, height 182
KY_MAE-10 [mm] "Spacer Nylon Support"
  round 2.8 hole 3 unplated mask+0.102: ""(0,0)
  body extent -3.19,-2.75 3.19,2.75, height 10
LED_LTST-C190 [mm] "Lite-On"
  rect 0.8x0.8 smd: 1(-0.75,0) 2(0.75,0)
  silkscreen extent -1.1,-0.8 1.8,0.8, body extent -0.85,-0.45 0.85,0.45, height 0.9
Molex_1051640001 [mm] "Receptacle, USB 2.0, Micro B, 5 Pos, 0.65mm Pitch, R/A, SMT"
  rrect22% 0.45x1.38 smd: 1(1.3,4.11) 2(0.65,4.11) 3(0,4.11) 4(-0.65,4.11) 5(-1.3,4.11)
  rrect7% 1.475x2.1 smd: 6(-2.462,3.75) 11(2.462,3.75)
  rrect100% 1.4x2.1 hole 0.6 slot 1.3 at 90 deg: 7(-3.95,1.45) 10(3.95,1.45)
  rrect7% 1.375x1.9 smd: 8(-0.937,1.45) 9(0.937,1.45)
  silkscreen extent 1.2,5.1 1.4,5.4, body extent -4.1,-0.7 4.1,4.47, height 2.45
NDK_NX3225GA [mm] "NDK"
  rect 1.2x1.4 smd: 1(-0.8,1.1) 2(-0.8,-1.1) 3(0.8,-1.1) 4(0.8,1.1)
  silkscreen extent -1.9,-0.1 1.4,2, body extent -1.3,-1.65 1.3,1.65, height 0.9
NPTH125mil [mil]
  round 120 hole 125 unplated mask+15: 1(0,0)
PDT0128A [mm] "Thin QFP, 128-Leads, Body 14x14mm, Pitch 0.4mm"
  oval 1.4x0.2 smd: 1(-7.7,6.2) 2(-7.7,5.8) 3(-7.7,5.4) 4(-7.7,5) 5(-7.7,4.6) 6(-7.7,4.2) 7(-7.7,3.8) 8(-7.7,3.4) 9(-7.7,3) 10(-7.7,2.6) 11(-7.7,2.2) 12(-7.7,1.8) 13(-7.7,1.4) 14(-7.7,1) 15(-7.7,0.6) 16(-7.7,0.2) 17(-7.7,-0.2) 18(-7.7,-0.6) 19(-7.7,-1) 20(-7.7,-1.4) 21(-7.7,-1.8) 22(-7.7,-2.2) 23(-7.7,-2.6) 24(-7.7,-3) 25(-7.7,-3.4) 26(-7.7,-3.8) 27(-7.7,-4.2) 28(-7.7,-4.6) 29(-7.7,-5) 30(-7.7,-5.4) 31(-7.7,-5.8) 32(-7.7,-6.2) 65(7.7,-6.2) 66(7.7,-5.8) 67(7.7,-5.4) 68(7.7,-5) 69(7.7,-4.6) 70(7.7,-4.2) 71(7.7,-3.8) 72(7.7,-3.4) 73(7.7,-3) 74(7.7,-2.6) 75(7.7,-2.2) 76(7.7,-1.8) 77(7.7,-1.4) 78(7.7,-1) 79(7.7,-0.6) 80(7.7,-0.2) 81(7.7,0.2) 82(7.7,0.6) 83(7.7,1) 84(7.7,1.4) 85(7.7,1.8) 86(7.7,2.2) 87(7.7,2.6) 88(7.7,3) 89(7.7,3.4) 90(7.7,3.8) 91(7.7,4.2) 92(7.7,4.6) 93(7.7,5) 94(7.7,5.4) 95(7.7,5.8) 96(7.7,6.2)
  oval 0.2x1.4 smd: 33(-6.2,-7.7) 34(-5.8,-7.7) 35(-5.4,-7.7) 36(-5,-7.7) 37(-4.6,-7.7) 38(-4.2,-7.7) 39(-3.8,-7.7) 40(-3.4,-7.7) 41(-3,-7.7) 42(-2.6,-7.7) 43(-2.2,-7.7) 44(-1.8,-7.7) 45(-1.4,-7.7) 46(-1,-7.7) 47(-0.6,-7.7) 48(-0.2,-7.7) 49(0.2,-7.7) 50(0.6,-7.7) 51(1,-7.7) 52(1.4,-7.7) 53(1.8,-7.7) 54(2.2,-7.7) 55(2.6,-7.7) 56(3,-7.7) 57(3.4,-7.7) 58(3.8,-7.7) 59(4.2,-7.7) 60(4.6,-7.7) 61(5,-7.7) 62(5.4,-7.7) 63(5.8,-7.7) 64(6.2,-7.7) 97(6.2,7.7) 98(5.8,7.7) 99(5.4,7.7) 100(5,7.7) 101(4.6,7.7) 102(4.2,7.7) 103(3.8,7.7) 104(3.4,7.7) 105(3,7.7) 106(2.6,7.7) 107(2.2,7.7) 108(1.8,7.7) 109(1.4,7.7) 110(1,7.7) 111(0.6,7.7) 112(0.2,7.7) 113(-0.2,7.7) 114(-0.6,7.7) 115(-1,7.7) 116(-1.4,7.7) 117(-1.8,7.7) 118(-2.2,7.7) 119(-2.6,7.7) 120(-3,7.7) 121(-3.4,7.7) 122(-3.8,7.7) 123(-4.2,7.7) 124(-4.6,7.7) 125(-5,7.7) 126(-5.4,7.7) 127(-5.8,7.7) 128(-6.2,7.7)
  silkscreen extent -7.7,-6.3 6.3,6.99, body extent -8,-8 8,8, height 1.07
PEC03SAAN_Launchpad_3V3 [mm] "SULLINS"
  rect 1.65x1.65 hole 1.016: 1(-2.54,0)
  round 1.65 hole 1.016: 2(0,0) 3(2.54,0)
  silkscreen extent -3.81,-1.27 3.81,6.3, body extent -3.84,-1.3 3.84,1.3, height 8.38
PEC03SAAN_Launchpad_5V0 [mm] "SULLINS"
  rect 1.65x1.65 hole 1.016: 1(-2.54,0)
  round 1.65 hole 1.016: 2(0,0) 3(2.54,0)
  silkscreen extent -3.81,-6.31 3.81,1.27, body extent -3.84,-1.3 3.84,1.3, height 8.38
RHB0032N-MFG [mm]
  rrect40% 0.6x0.25 smd paste+0 mask+0: 1(-2.4,1.75) 2(-2.4,1.25) 3(-2.4,0.75) 4(-2.4,0.25) 5(-2.4,-0.25) 6(-2.4,-0.75) 7(-2.4,-1.25) 8(-2.4,-1.75) 17(2.4,-1.75) 18(2.4,-1.25) 19(2.4,-0.75) 20(2.4,-0.25) 21(2.4,0.25) 22(2.4,0.75) 23(2.4,1.25) 24(2.4,1.75)
  rrect40% 0.25x0.6 smd paste+0 mask+0: 9(-1.75,-2.4) 10(-1.25,-2.4) 11(-0.75,-2.4) 12(-0.25,-2.4) 13(0.25,-2.4) 14(0.75,-2.4) 15(1.25,-2.4) 16(1.75,-2.4) 25(1.75,2.4) 26(1.25,2.4) 27(0.75,2.4) 28(0.25,2.4) 29(-0.25,2.4) 30(-0.75,2.4) 31(-1.25,2.4) 32(-1.75,2.4)
  rrect3% 3.45x3.45 smd paste-1000 mask+0: 33(0,0)
  silkscreen extent -3.4,-2.55 2.55,2.55, body extent -2.8,-2.8 2.8,2.8, height 0.25
RSA0016B [mm] "QFN, 16-Leads, Body 4x4mm, Pitch 0.65mm, Thermal Pad 2.7x2.7mm, TI Recommended"
  oval 0.6x0.3 smd: 1(-1.9,0.975) 2(-1.9,0.325) 3(-1.9,-0.325) 4(-1.9,-0.975) 9(1.9,-0.975) 10(1.9,-0.325) 11(1.9,0.325) 12(1.9,0.975)
  oval 0.3x0.6 smd: 5(-0.975,-1.9) 6(-0.325,-1.9) 7(0.325,-1.9) 8(0.975,-1.9) 13(0.975,1.9) 14(0.325,1.9) 15(-0.325,1.9) 16(-0.975,1.9)
  rect 2.7x2.7 smd paste-1.35: 17(0,0)
  Top Layer keep-out region: -2,1.5 -1.5,1.5 -1.5,2 -2,2
  silkscreen extent -2.2,-2.2 2.2,2.2, body extent -2.05,-2.05 2.05,2.05, height 1.01
RSE0008A [mm] "QFN, 8-Leads, Body 1.5x1.5mm, Pitch 0.5mm, TI Recommended"
  rrect40% 0.55x0.25 smd: 1(-0.675,0.5) 3(-0.675,-0.5) 5(0.675,-0.5) 7(0.675,0.5)
  rrect50% 0.55x0.2 smd: 2(-0.675,0) 6(0.675,0)
  rrect33% 0.3x0.6 smd: 4(0,-0.65) 8(0,0.65)
  silkscreen extent -1.02,-0.92 0.77,0.93, body extent -0.75,-0.75 0.75,0.75, height 0.6
Samtec_FTSH-105-01-x-DV-K [mm] "Header(Shrouded), 1.27mm, 5x2, SMT"
  rect 2.79x0.74 smd: 1(-2.035,2.54) 2(2.035,2.54) 3(-2.035,1.27) 4(2.035,1.27) 5(-2.035,0) 6(2.035,0) 7(-2.035,-1.27) 8(2.035,-1.27) 9(-2.035,-2.54) 10(2.035,-2.54)
  silkscreen extent -3.73,-3.48 3.73,3.48, body extent -2.92,-3.18 2.92,3.17, height 6.13
SNT-100-BK-G [mil] "Samtec STEP model"
  round 1 on Mech3: 0(0,0)
  body extent -100,-50 100,50, height 344
SOT-323 [mm] "Diodes Inc recommended land pattern.  2016-02-24"
  rrect21% 0.6x0.47 smd: 1(-0.95,0.65) 2(-0.95,-0.65) 3(0.95,0)
  silkscreen extent -1.14,-1.22 0.77,1.22, body extent -1.13,-1.13 1.12,1.12, height 1.13
Sullins_PxC09DAAN [mm] "Header, 2.54mm, 9x2, TH"
  rrect50% 1.55x1.55 hole 1.02: 1(-1.27,-10.16)
  round 1.55 hole 1.02: 2(1.27,-10.16) 3(-1.27,-7.62) 4(1.27,-7.62) 5(-1.27,-5.08) 6(1.27,-5.08) 7(-1.27,-2.54) 8(1.27,-2.54) 9(-1.27,0) 10(1.27,0) 11(-1.27,2.54) 12(1.27,2.54) 13(-1.27,5.08) 14(1.27,5.08) 15(-1.27,7.62) 16(1.27,7.62) 17(-1.27,10.16) 18(1.27,10.16)
  silkscreen extent -2.95,-11.43 2.54,11.43, body extent -2.54,-11.43 2.54,11.43, height 8.38
SW_1188E [mm] "SMD, 4-Leads, Body 7.8x3.5mm"
  rrect10% 1x1.45 smd: 1(-1.1,3.375) 2(-1.1,-3.375)
  rrect11% 1.3x0.9 smd: 3(0.7,2.1) 4(0.7,-2.1)
  round 0 hole 0.9 unplated: ""(-0.35,-1.15) ""(-0.35,1.15)
  silkscreen extent -1.97,-2.28 0.95,2.28, body extent -2.55,-3.9 1.05,3.9, height 3.5
TI_Horizontal_Overlay_Medium [mil]
  silkscreen extent -751,-93 750,94
TI_Horizontal_Overlay_Small [mil]
  silkscreen extent -545,-68 545,67
TSW-102-07-G-S [mm] "Samtec 100mil, 1x2, 230 mil above insulator"
  rrect50% 1.65x1.65 hole 1.016: 1(-1.27,0)
  round 1.65 hole 1.016: 2(1.27,0)
  body extent -2.54,-1.27 2.54,1.27, height 8.38
WEEE_Minimum [mil] "WEEElie bin"
  silkscreen extent -95,-172 99,104

## Part data
C1 C2 C5: library part CMP-0085577-2, "CAP, CERM, 0.1 µF, 25 V,+/- 10%, X5R, 0603", Cap_Case=0603, Manufacturer="Samsung Electro-Mechanics", TempCo=X5R, Tolerance_%=10%, Value2=25V, ValueDisplayed=0.1µF, AEC Category=Q200, AEC Grade=N/A, AEC Qualified=N, Cap_F=100nF, ComponentLink1Description="Datasheet link", ComponentLink1URL=http://www.samsungsem.com/kr/support/product-search/mlcc/__icsFiles/afieldfile/2018/06/20/CL10A104KA8NNNC.pdf, CompType=Capacitor, Green_EU RoHS=Passed, Green_EU RoHS-2=Incomplete, Green_Lifecycle=Active, Green_REACh=Incomplete, MountType=SMT, PackageReference=0603, PartNumber=CL10A104KA8NNNC, Polarized=N, RoHS=Y, SizeArea_mm2=1.28, SizeAreaWB_mm2=4.68, SizeX_mm=1.6, SizeY_mm=0.8, SizeZ_mm=1, TaMax_C=85°C, TaMin_C=-55°C, Technology=Ceramic, U/M=EA
C3: library part CMP-0006227-2, "CAP, CERM, 0.01 uF, 16 V, +/- 10%, X7R, 0402", Cap_Case=0402, Manufacturer="Wurth Elektronik", Supplier Part Number 1=710-885012205031, TempCo=X7R, Tolerance_%=10%, Value1=Unknown, Value2=16V, ValueDisplayed=0.01uF, AEC Category=Q200, AEC Grade=N/A, AEC Qualified=N, Cap_F=10nF, ComponentLink1Description="Datasheet link", ComponentLink1URL=http://katalog.we-online.de/pbs/datasheet/885012205031.pdf, CompType=Capacitor, LatestRevisionDate=2017-03-09, MountType=SMT, PackageReference=0402, PartNumber=885012205031, Polarized=N, Published=2008-06-19, Publisher="Texas Instruments", RoHS=Y, SizeArea_mm2=0.5, SizeAreaWB_mm2=3, SizeX_mm=1, SizeY_mm=0.5, SizeZ_mm=0.6, Supplier 1=Mouser, TaMax_C=125°C, TaMin_C=-55°C, Technology=Ceramic, U/M=EA, VDC_V=16V
C4: library part CMP-0086225-1, "CAP, CERM, 10 µF, 16 V,+/- 10%, X5R, 0603", Cap_Case=0603, Manufacturer=MuRata, Supplier Part Number 1=490-10728-1-ND, TempCo=X5R, Tolerance_%=10%, Value2=16V, ValueDisplayed=10µF, AEC Category=Q200, AEC Grade=N/A, AEC Qualified=N, Cap_F=10µF, ComponentLink1Description="Datasheet link", ComponentLink1URL=https://search.murata.co.jp/Ceramy/image/img/A01X/G101/ENG/GRM188R61C106KAAL-01.pdf, CompType=Capacitor, MountType=SMT, PackageReference=0603, PartNumber=GRM188R61C106KAALD, Polarized=N, RoHS=Y, SizeArea_mm2=1.28, SizeAreaWB_mm2=4.68, SizeX_mm=1.6, SizeY_mm=0.8, SizeZ_mm=1, Supplier 1=Digi-Key, Supplier 2=Newark, Supplier 3=Mouser, TaMax_C=85°C, TaMin_C=-55°C, Technology=Ceramic, U/M=EA
C6: library part CMP-0006945-5, "CAP, CERM, 0.47 uF, 10 V, +/- 10%, X5R, 0603", Cap_Case=0603, Manufacturer=Kemet, Supplier Part Number 1=399-3114-1-ND, TempCo=X5R, Tolerance_%=10%, Value1=Unknown, Value2=10V, ValueDisplayed=0.47uF, AEC Category=Q200, AEC Qualified=?, Cap_F=470nF, ComponentLink1Description="Datasheet link", ComponentLink1URL=http://www.kemet.com/kemet/web/homepage/kechome.nsf/vapubfiles/F3102_Y5V.pdf/$file/F3102_Y5V.pdf, CompType=Capacitor, LatestRevisionDate=2017-03-09, MountType=SMT, PackageReference=0603, PartNumber=C0603C474K8PACTU, Polarized=N, Published=2008-06-19, Publisher="Texas Instruments", RoHS=Y, SizeArea_mm2=1.28, SizeAreaWB_mm2=4.68, SizeX_mm=1.6, SizeY_mm=0.8, SizeZ_mm=1, Supplier 1=Digi-Key, Supplier 2=Mouser, Supplier Part Number 2=80-C0603C474K8P, TaMax_C=85°C, TaMin_C=-55°C, Technology=Ceramic, U/M=EA, VDC_V=10V
C7: library part CMP-0006388-2, "CAP, CERM, 47 pF, 25 V, +/- 5%, C0G/NP0, 0402", Cap_Case=0402, Manufacturer=MuRata, Supplier Part Number 1=81-GRM1555C1E470JA1D, TempCo=C0G/NP0, Tolerance_%=5%, Value1=Unknown, Value2=25V, ValueDisplayed=47pF, AEC Category=Q200, AEC Qualified=?, Cap_F=47pF, ComponentLink1Description="Datasheet link", ComponentLink1URL=http://search.murata.co.jp/Ceramy/PnsearchViewAction.do?HnOFG=ON&HnNFG=ON&SEL_CNT=50&sLang=en&sKey=GRM1555C1E470JA01D&x=9&y=9&search=startwith, CompType=Capacitor, LatestRevisionDate=2017-03-09, MountType=SMT, PackageReference=0402, PartNumber=GRM1555C1E470JA01D, Polarized=N, Published=2008-06-19, Publisher="Texas Instruments", RoHS=Y, SizeArea_mm2=0.5, SizeAreaWB_mm2=3, SizeX_mm=1, SizeY_mm=0.5, SizeZ_mm=0.6, Supplier 1=Mouser, TaMax_C=125°C, TaMin_C=-55°C, Technology=Ceramic, U/M=EA, VDC_V=25V
C8 C11: library part CMP-0007002-5, "CAP, CERM, 1 uF, 10 V, +/- 10%, X5R, 0603", Cap_Case=0603, Manufacturer=TDK, Supplier Part Number 1=445-1321-1-ND, TempCo=X5R, Tolerance_%=10%, Value1=Unknown, Value2=10V, ValueDisplayed=DNC, AEC Category=Q200, AEC Grade=N/A, AEC Qualified=N, Cap_F=1µF, ComponentLink1Description="Datasheet link", ComponentLink1URL=https://product.tdk.com/info/en/catalog/datasheets/mlcc_commercial_general_en.pdf, CompType=Capacitor, LatestRevisionDate=2017-03-09, MountType=SMT, PackageReference=0603, PartNumber=C1608X5R1A105K080AC, Polarized=N, Published=2008-06-19, Publisher="Texas Instruments", RoHS=Y, SizeArea_mm2=1.28, SizeAreaWB_mm2=4.68, SizeX_mm=1.6, SizeY_mm=0.8, SizeZ_mm=1, Supplier 1=Digi-Key, Supplier 2=Newark, Supplier 3=Mouser, Supplier Part Number 2=05X9843, Supplier Part Number 3=810-C1608X5R1A105K, TaMax_C=85°C, TaMin_C=-55°C, Technology=Ceramic, U/M=EA, VDC_V=10V
C9 C10 C52 C57: library part CMP-0006906-5, "CAP, CERM, 2.2 uF, 10 V, +/- 10%, X5R, 0603", Cap_Case=0603, Manufacturer=Kemet, Supplier Part Number 1=399-4911-1-ND, TempCo=X5R, Tolerance_%=10%, Value1=Unknown, Value2=10V, ValueDisplayed=2.2uF, AEC Category=Q200, AEC Qualified=?, Cap_F=2.2µF, ComponentLink1Description="Datasheet link", ComponentLink1URL=http://www.kemet.com/kemet/web/homepage/kechome.nsf/vapubfiles/F3102_Y5V.pdf/$file/F3102_Y5V.pdf, CompType=Capacitor, LatestRevisionDate=2017-03-09, MountType=SMT, PackageReference=0603, PartNumber=C0603C225K8PACTU, Polarized=N, Published=2008-06-19, Publisher="Texas Instruments", RoHS=Y, SizeArea_mm2=1.28, SizeAreaWB_mm2=4.68, SizeX_mm=1.6, SizeY_mm=0.8, SizeZ_mm=1, Supplier 1=Digi-Key, Supplier 2=Mouser, Supplier 3=Farnell, Supplier Part Number 2=80-C0603C225K8P, Supplier Part Number 3=1108322, TaMax_C=85°C, TaMin_C=-55°C, Technology=Ceramic, U/M=EA, VDC_V=10V
C12: library part CMP-0085577-2, "CAP, CERM, 0.1 µF, 25 V,+/- 10%, X5R, 0603", Cap_Case=0603, Manufacturer="Samsung Electro-Mechanics", TempCo=X5R, Tolerance_%=10%, Value2=25V, ValueDisplayed=DNC, AEC Category=Q200, AEC Grade=N/A, AEC Qualified=N, Cap_F=100nF, ComponentLink1Description="Datasheet link", ComponentLink1URL=http://www.samsungsem.com/kr/support/product-search/mlcc/__icsFiles/afieldfile/2018/06/20/CL10A104KA8NNNC.pdf, CompType=Capacitor, Green_EU RoHS=Passed, Green_EU RoHS-2=Incomplete, Green_Lifecycle=Active, Green_REACh=Incomplete, MountType=SMT, PackageReference=0603, PartNumber=CL10A104KA8NNNC, Polarized=N, RoHS=Y, SizeArea_mm2=1.28, SizeAreaWB_mm2=4.68, SizeX_mm=1.6, SizeY_mm=0.8, SizeZ_mm=1, TaMax_C=85°C, TaMin_C=-55°C, Technology=Ceramic, U/M=EA
C13 C17 C18 C23 C26 C27 C32 C37 C38 C43: library part CMP-0006259-2, "CAP, CERM, 0.1 uF, 10 V, +/- 10%, X5R, 0402", Cap_Case=0402, Manufacturer=TDK, Supplier Part Number 1=445-1265-1-ND, TempCo=X5R, Tolerance_%=10%, Value1=Unknown, Value2=10V, ValueDisplayed=0.1uF, AEC Category=Q200, AEC Qualified=?, Cap_F=100nF, ComponentLink1Description="Datasheet link", ComponentLink1URL=http://product.tdk.com/en/catalog/datasheets/mlcc_commercial_general_en.pdf, CompType=Capacitor, LatestRevisionDate=2017-03-09, MountType=SMT, PackageReference=0402, PartNumber=C1005X5R1A104K050BA, Polarized=N, Published=2008-06-19, Publisher="Texas Instruments", RoHS=Y, SizeArea_mm2=0.5, SizeAreaWB_mm2=3, SizeX_mm=1, SizeY_mm=0.5, SizeZ_mm=0.6, Supplier 1=Digi-Key, Supplier 2=Newark, Supplier 3=Mouser, Supplier Part Number 2=90R7585, Supplier Part Number 3=810-C1005X5R1A104K, TaMax_C=85°C, TaMin_C=-55°C, Technology=Ceramic, U/M=EA, VDC_V=10V
C14 C15 C16 C21 C25: library part CMP-0006658-2, "CAP, CERM, 0.01 uF, 25 V, +/- 10%, X7R, 0402", Cap_Case=0402, Manufacturer=MuRata, Supplier Part Number 1=490-1312-1-ND, TempCo=X7R, Tolerance_%=10%, Value1=Unknown, Value2=25V, ValueDisplayed=0.01uF, AEC Category=Q200, AEC Qualified=?, Cap_F=10nF, ComponentLink1Description="Datasheet link", ComponentLink1URL=http://search.murata.co.jp/Ceramy/PnsearchViewAction.do?HnOFG=ON&HnNFG=ON&SEL_CNT=50&sLang=en&sKey=GRM155R71E103KA01D&x=9&y=9&search=startwith, CompType=Capacitor, LatestRevisionDate=2017-03-09, MountType=SMT, PackageReference=0402, PartNumber=GRM155R71E103KA01D, Polarized=N, Published=2008-06-19, Publisher="Texas Instruments", RoHS=Y, SizeArea_mm2=0.5, SizeAreaWB_mm2=3, SizeX_mm=1, SizeY_mm=0.5, SizeZ_mm=0.6, Supplier 1=Digi-Key, Supplier 2=Mouser, Supplier 3=Farnell, Supplier Part Number 2=81-GRM36X103K25, Supplier Part Number 3=8819734, TaMax_C=125°C, TaMin_C=-55°C, Technology=Ceramic, U/M=EA, VDC_V=25V
C19 C20 C24 C54: library part CMP-0006276-2, "CAP, CERM, 1 uF, 25 V, +/- 10%, X5R, 0402", Cap_Case=0402, Manufacturer=TDK, Supplier Part Number 1=445-9066-1-ND, TempCo=X5R, Tolerance_%=10%, Value1=Unknown, Value2=25V, ValueDisplayed=1uF, AEC Category=Q200, AEC Grade=N/A, AEC Qualified=N, Cap_F=1µF, ComponentLink1Description="Datasheet link", ComponentLink1URL=https://product.tdk.com/info/en/catalog/datasheets/mlcc_commercial_general_en.pdf, CompType=Capacitor, LatestRevisionDate=2017-03-09, MountType=SMT, PackageReference=0402, PartNumber=C1005X5R1E105K050BC, Polarized=N, Published=2008-06-19, Publisher="Texas Instruments", RoHS=Y, SizeArea_mm2=0.5, SizeAreaWB_mm2=3, SizeX_mm=1, SizeY_mm=0.5, SizeZ_mm=0.6, Supplier 1=Digi-Key, Supplier 2=Newark, Supplier 3=Mouser, Supplier Part Number 2=07W9127, Supplier Part Number 3=810-C1005X5R1E105K, TaMax_C=80°C, TaMin_C=-55°C, Technology=Ceramic, U/M=EA, VDC_V=25V
C22 C55: library part CMP-0006543-2, "CAP, CERM, 2.2 uF, 6.3 V, +/- 10%, X5R, 0402", Cap_Case=0402, Manufacturer=MuRata, Supplier Part Number 1=81-GRM155R60J225KE5D, TempCo=X5R, Tolerance_%=10%, Value1=Unknown, Value2=6.3V, ValueDisplayed=2.2uF, AEC Category=Q200, AEC Grade=N/A, AEC Qualified=N, Cap_F=2.2µF, ComponentLink1Description="Datasheet link", ComponentLink1URL=http://psearch.en.murata.com/capacitor/product/GRM155R60J225KE95%23.pdf, CompType=Capacitor, LatestRevisionDate=2017-03-09, MountType=SMT, PackageReference=0402, PartNumber=GRM155R60J225KE95D, Polarized=N, Published=2008-06-19, Publisher="Texas Instruments", RoHS=Y, SizeArea_mm2=0.5, SizeAreaWB_mm2=3, SizeX_mm=1, SizeY_mm=0.5, SizeZ_mm=0.6, Supplier 1=Mouser, TaMax_C=85°C, TaMin_C=-55°C, Technology=Ceramic, U/M=EA, VDC_V=6.3V
C28 C29: library part CMP-0006415-2, "CAP, CERM, 12 pF, 50 V, +/- 5%, C0G/NP0, 0402", Cap_Case=0402, Manufacturer=MuRata, Supplier Part Number 1=14T3292, TempCo=C0G/NP0, Tolerance_%=5%, Value1=Unknown, Value2=50V, ValueDisplayed=12pF, AEC Category=Q200, AEC Qualified=?, Cap_F=12pF, ComponentLink1Description="Datasheet link", ComponentLink1URL=http://search.murata.co.jp/Ceramy/PnsearchViewAction.do?HnOFG=ON&HnNFG=ON&SEL_CNT=50&sLang=en&sKey=GRM1555C1H120JA01D&x=9&y=9&search=startwith, CompType=Capacitor, LatestRevisionDate=2017-03-09, MountType=SMT, PackageReference=0402, PartNumber=GRM1555C1H120JA01D, Polarized=N, Published=2008-06-19, Publisher="Texas Instruments", RoHS=Y, SizeArea_mm2=0.5, SizeAreaWB_mm2=3, SizeX_mm=1, SizeY_mm=0.5, SizeZ_mm=0.6, Supplier 1=Newark, Supplier 2=Mouser, Supplier 3=Farnell, Supplier Part Number 2=81-GRM1555C1H120JA1D, Supplier Part Number 3=1828875, TaMax_C=125°C, TaMin_C=-55°C, Technology=Ceramic, U/M=EA, VDC_V=50V